# Altium PCB PX4FMUv2.4.6.PcbDoc (part 1 of 3)
Units mil, origin at the board's own origin, x right, y up, seen from the top; angles counter-clockwise.
Board outline 2756 x 1595 mil, 6 copper layers (Top, Ground, Horizontal, Vertical, Power, Bottom), stack 65.355 mil thick; 290 components, 261 nets, 1159 pads, 472 vias.
Unrouted connection lines stored in the file: 14.
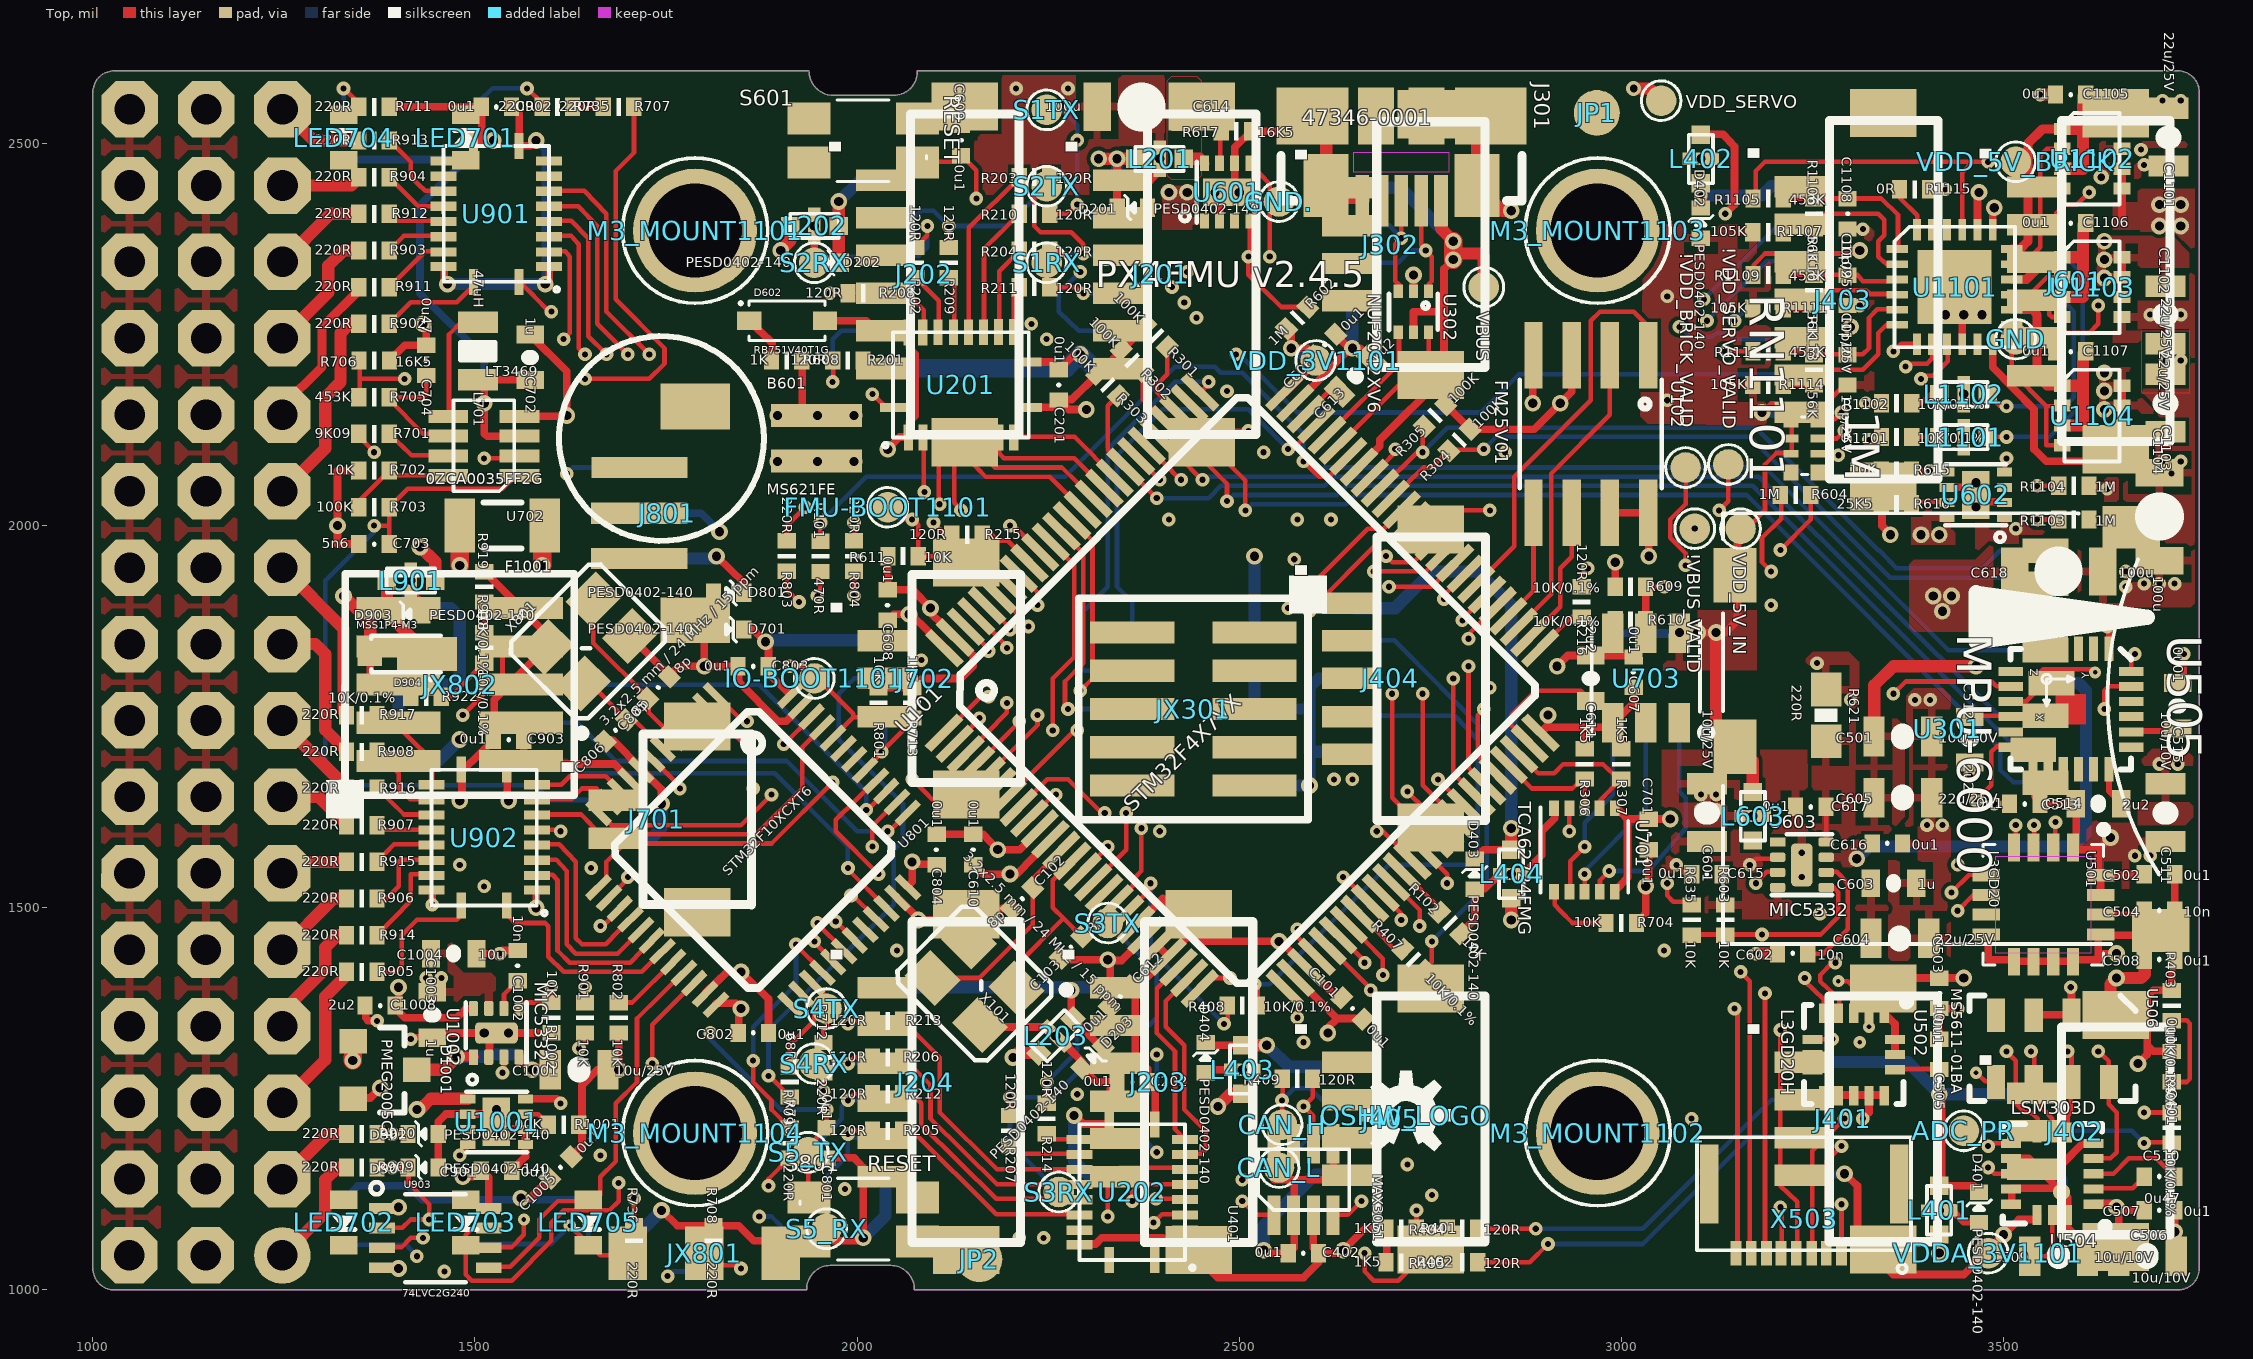
[diagram p0: Top view]
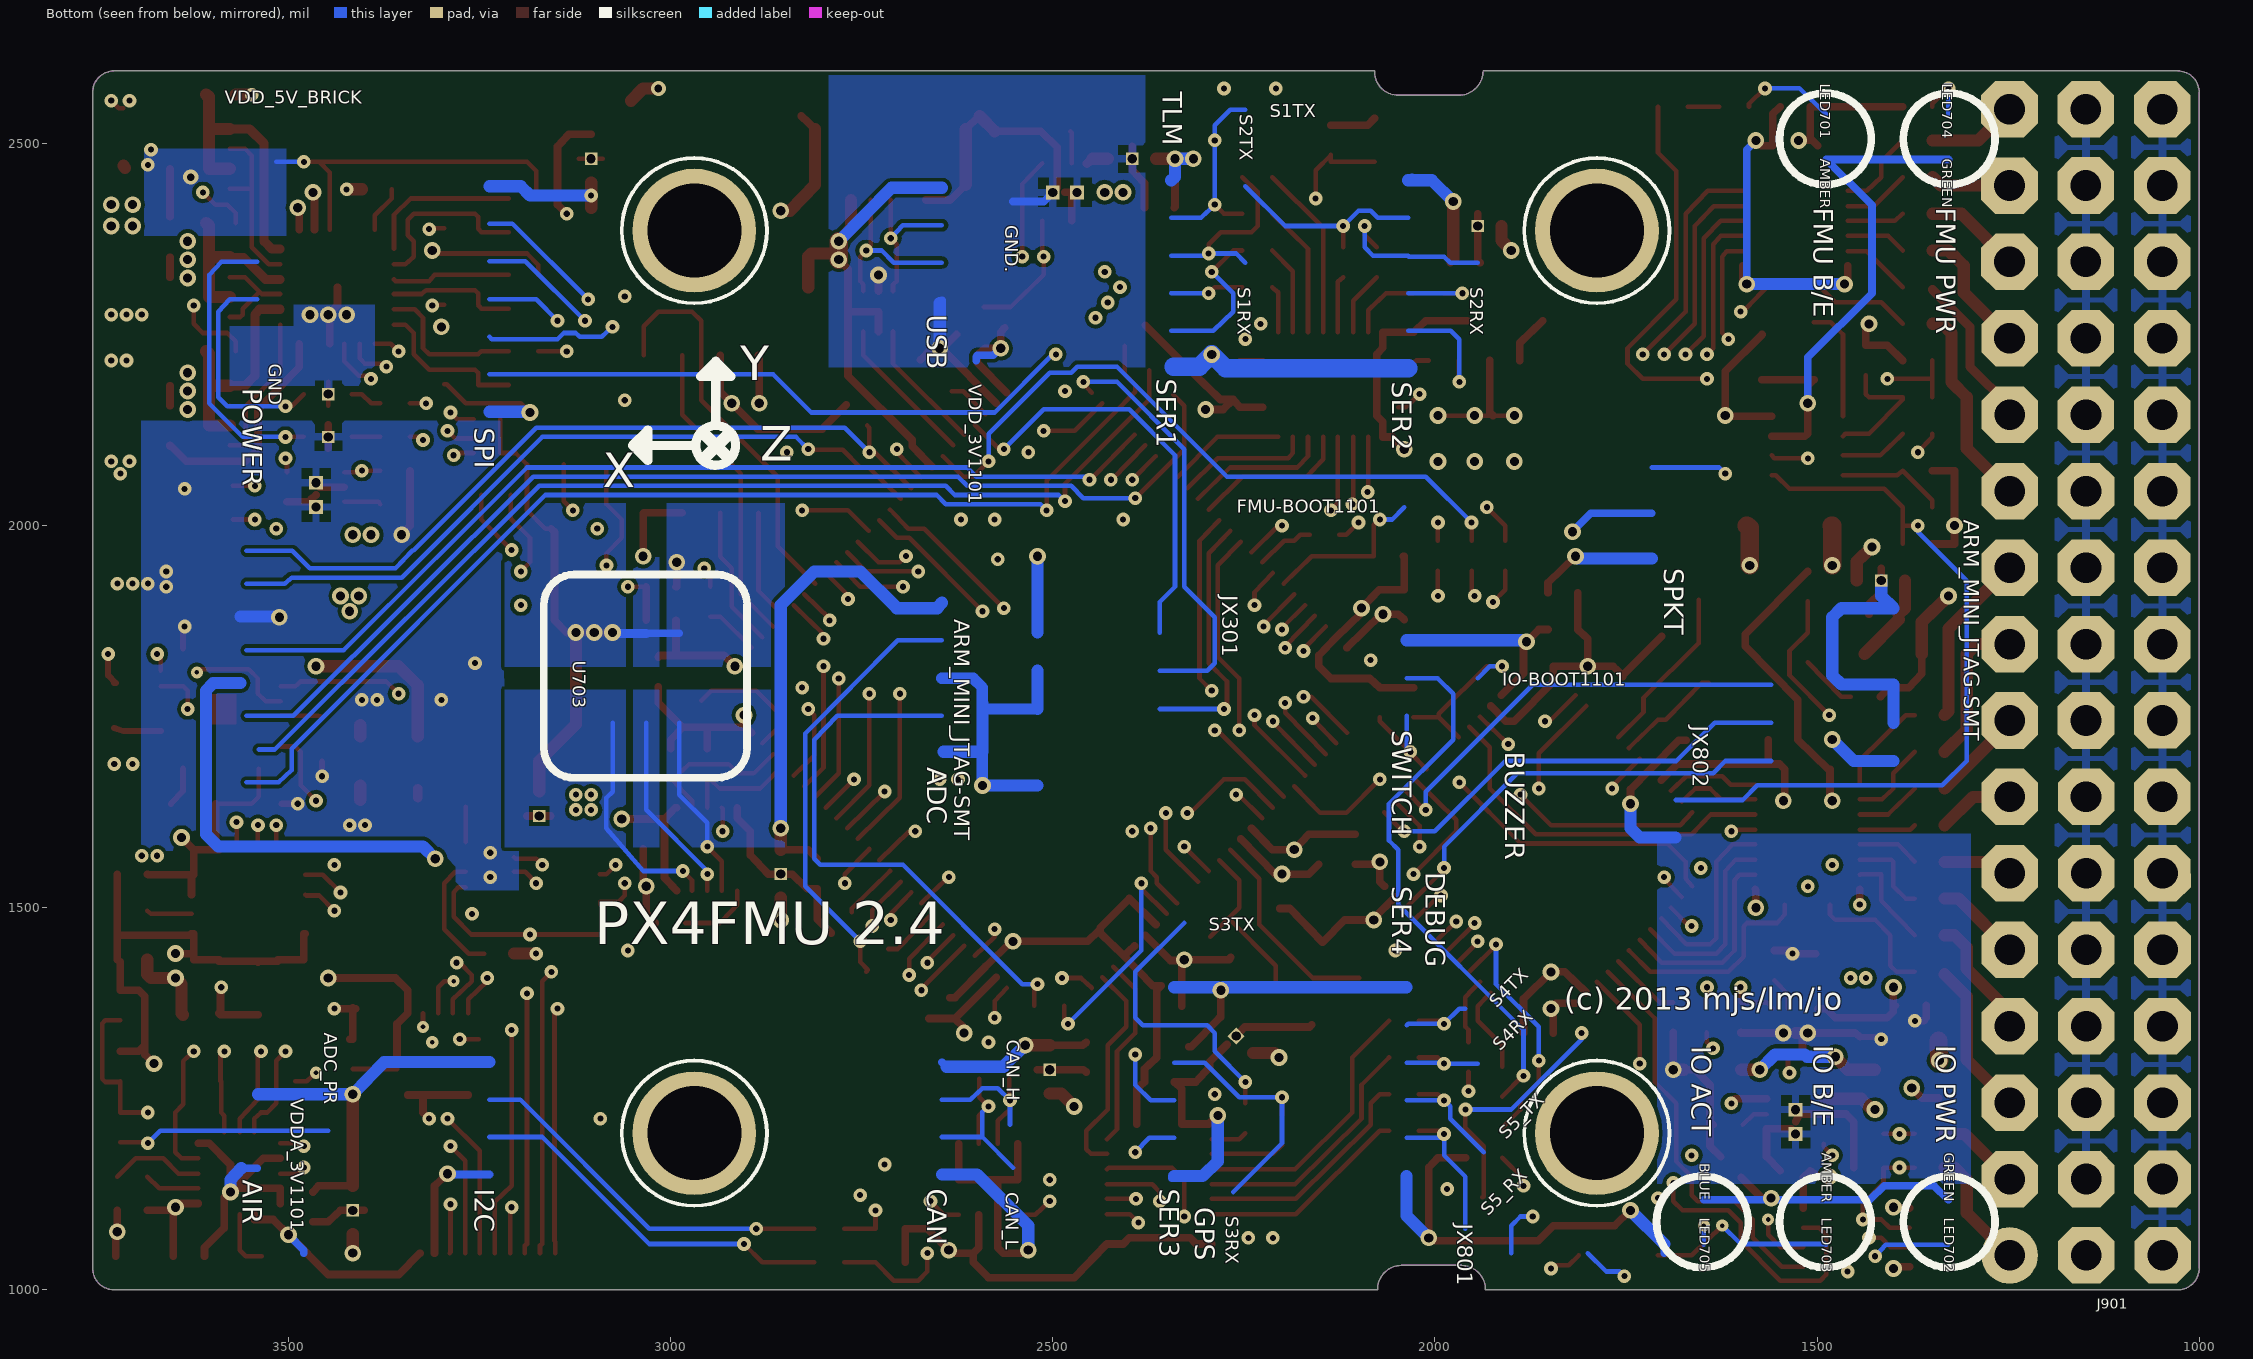
[diagram p1: Bottom view, seen from below]
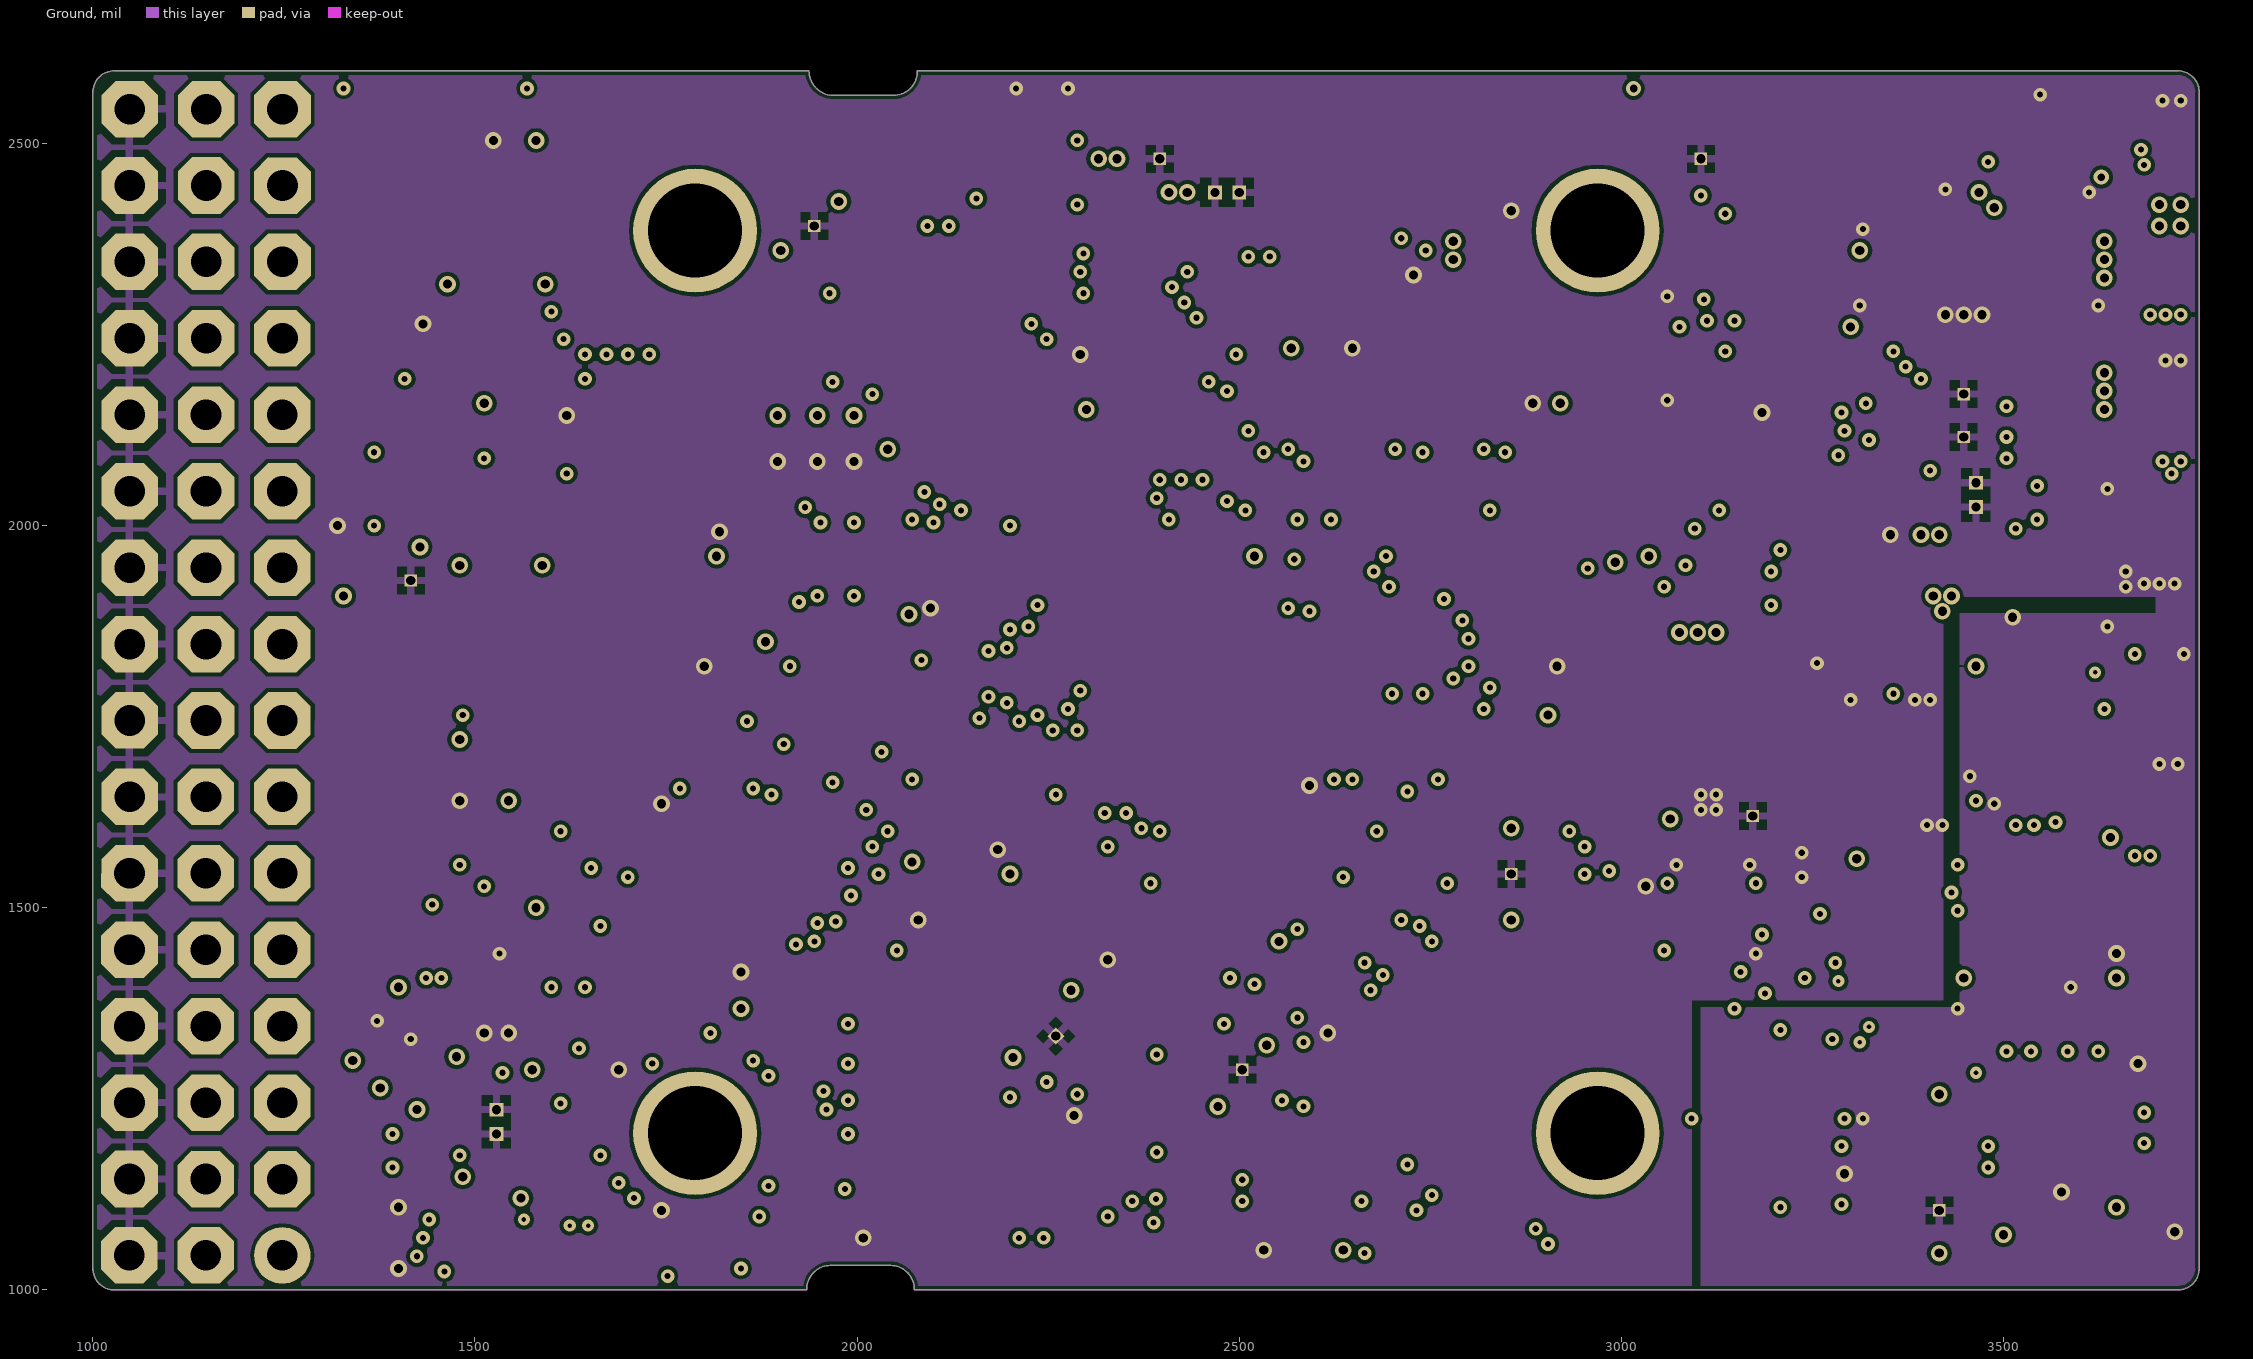
[diagram p2: Ground]
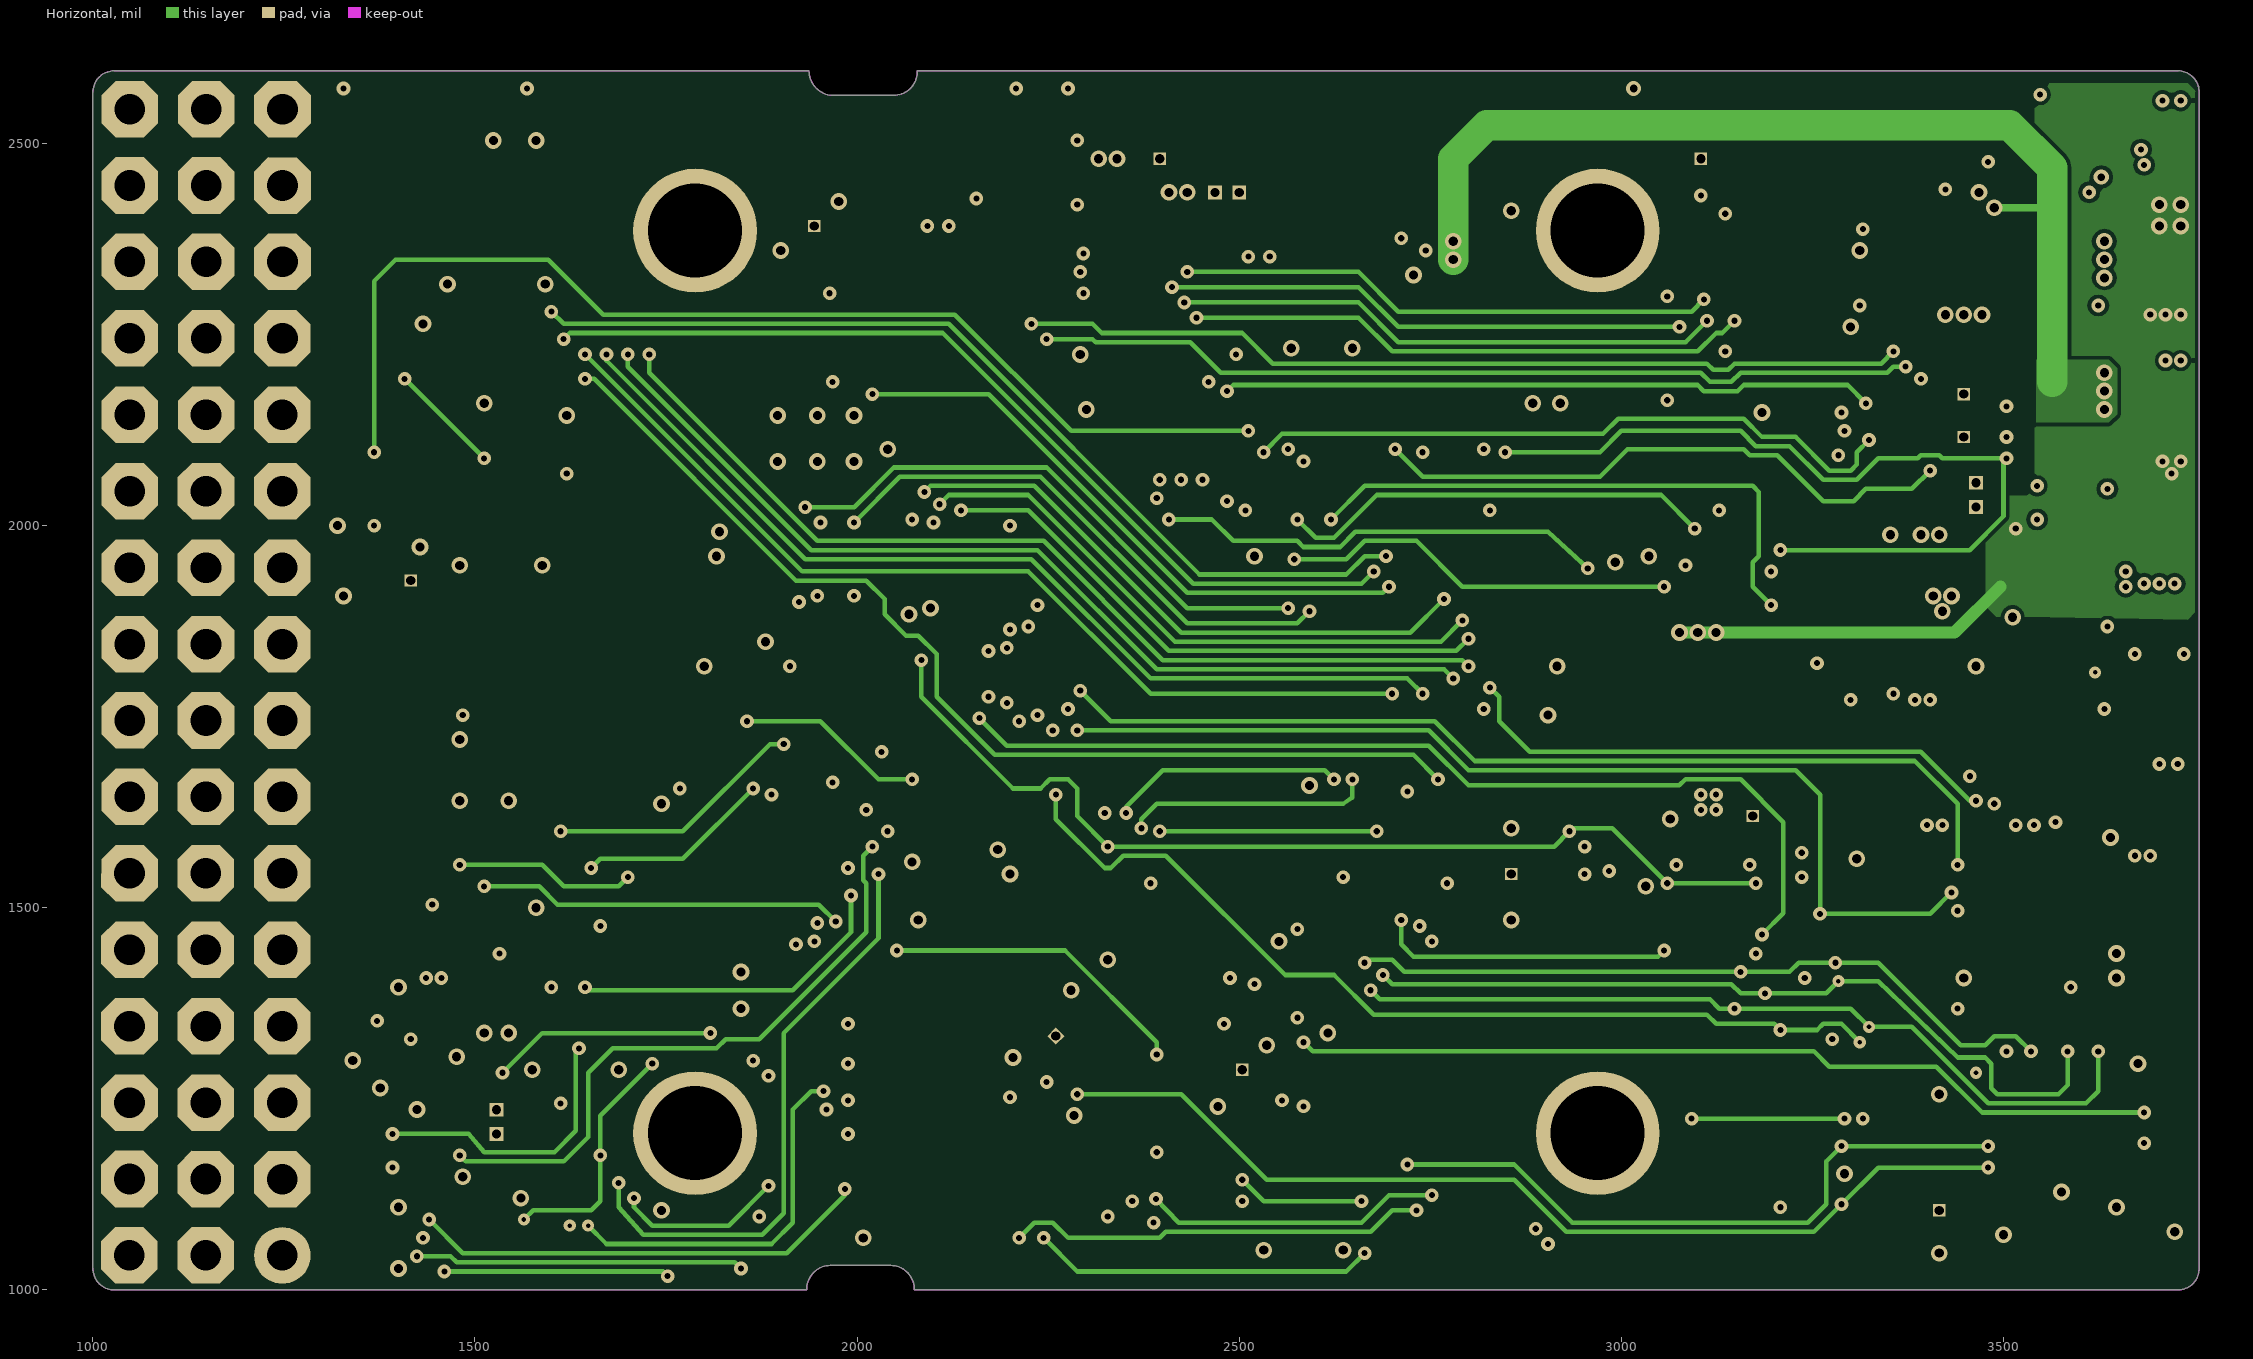
[diagram p3: Horizontal]
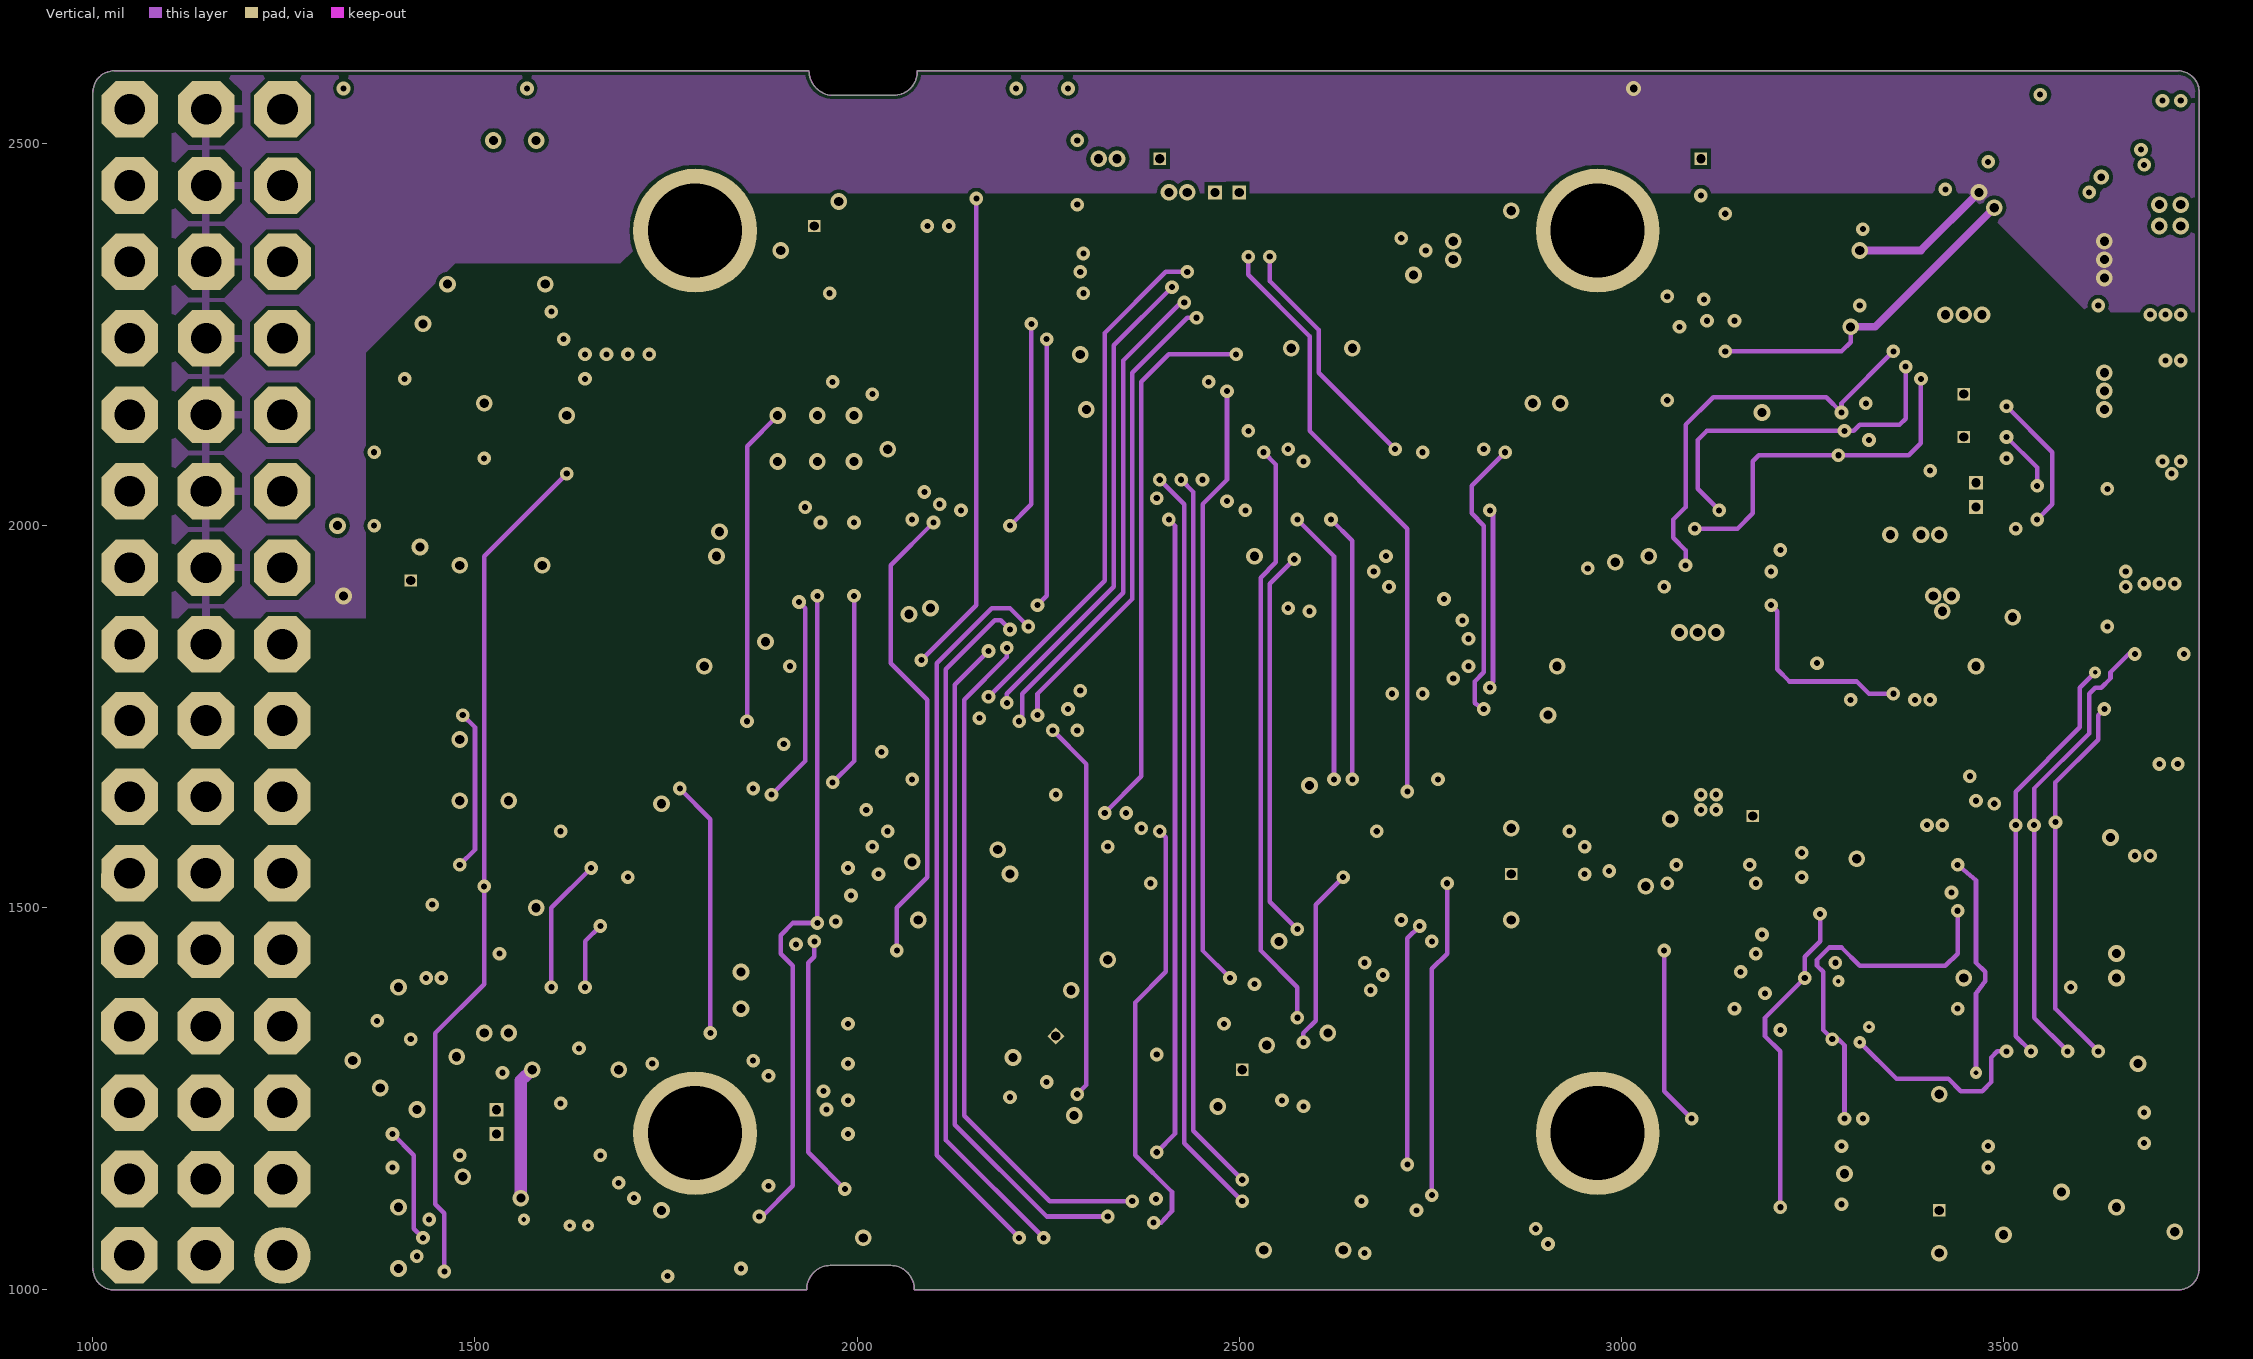
[diagram p4: Vertical]
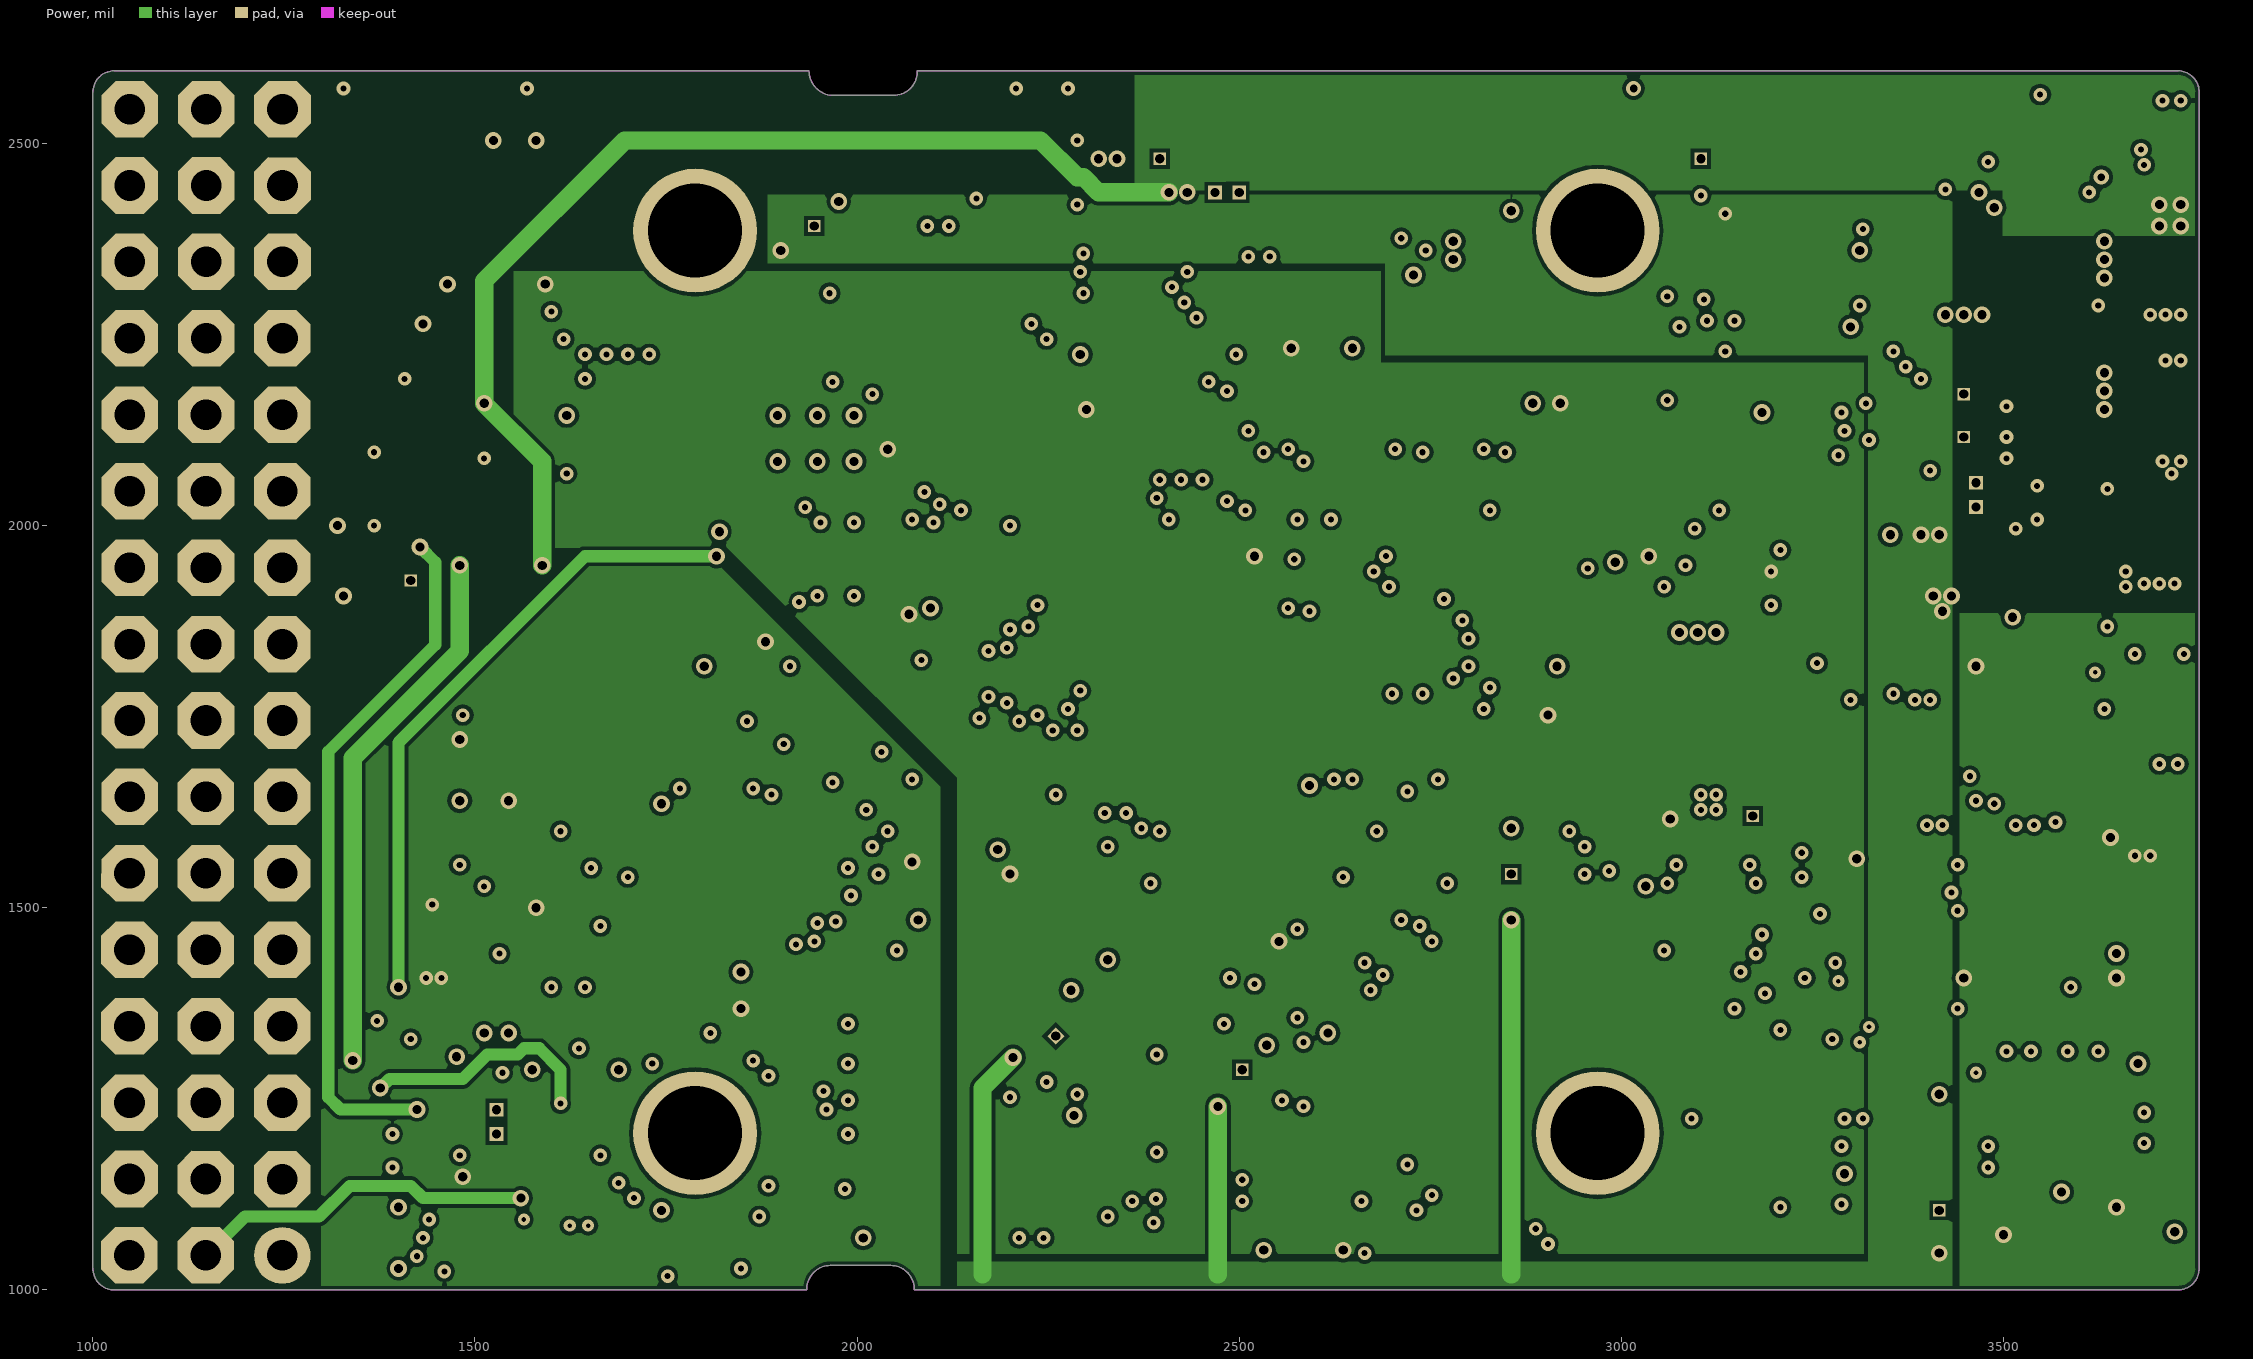
[diagram p5: Power]

## Layer stack, top to bottom
Top Solder: solder mask 0.4, Solder Resist, Dk 3.5
Top: signal copper 1.378
Dielectric 1: core 19.685, FR-4, Dk 4.8
Ground: signal copper 1.378
Dielectric 2: core 19.685, FR-4, Dk 4.8
Horizontal: signal copper 1.378
Dielectric 3: core 5.9055, FR-4, Dk 4.8
Vertical: signal copper 1.378
Dielectric 4: core 5.9055, FR-4, Dk 4.8
Power: signal copper 1.378
Dielectric 5: core 5.9055, FR-4, Dk 4.8
Bottom: signal copper 1.378
Bottom Solder: solder mask 0.4, Solder Resist, Dk 3.5

## Board outline
3729,2595 cw(c3728.5,2567.5) 3756,2567 3756,1028 cw(c3728.5,1027.5) 3729,1000 2075,1000 ccw(c2043.5,1000.5) 2044,1032 1965,1032 ccw(c1965.5,1000.5) 1934,1000 1028,1000 cw(c1028,1028) 1000,1028 1000,2567 cw(c1028,2567) 1028,2595 1937,2595 ccw(c1969,2595) 1969,2563 2048,2563 ccw(c2047.5,2594.5) 2079,2595

## Design rules (kind name [scope] priority, off if disabled: settings)
Clearance [All] p1: gap=5
Clearance "Clearance (Same Net)" [All] p2: gap=0
HoleSize HoleSize_1 [All] p1: absolutevalues=TRUE maxlimit=100000 minlimit=7.87 maxpercent=80.000 minpercent=20.000
HoleSize [All] p2: absolutevalues=TRUE maxlimit=100 minlimit=1 maxpercent=80.000 minpercent=20.000
HoleToHoleClearance mdViaViaSameLayer [All] p1: gap=8 allowstackedmicrovias=TRUE
HoleToHoleClearance [All] p2: gap=10 allowstackedmicrovias=TRUE
PasteMaskExpansion mlMinCreamFrame [All] p1: expansion=-4
PasteMaskExpansion [All] p2: expansion=0
PolygonConnect ThermalVias [IsVia] p1: connectstyle=Direct reliefconductorwidth=10 reliefentries=4 polygonreliefangle="90 Angle" airgapwidth=10
PolygonConnect [All] p2: connectstyle=Relief reliefconductorwidth=10 reliefentries=4 polygonreliefangle="90 Angle" airgapwidth=10
RoutingVias [All] p1: holewidth=28 width=50 viastyle="Through Hole" minholewidth=28 minwidth=50 maxholewidth=28 maxwidth=50
SilkToSilkClearance [All] p1 off: silktosilkclearance=10
SilkToSolderMaskClearance [IsPad] p1 off: minsilkscreentomaskgap=10 clearancetoexposedcopper=TRUE
SolderMaskExpansion mlMinStopFrame [All] p1: expansion=1
SolderMaskExpansion [All] p2: expansion=4
Width Width_1 [All] p1: maxlimit=100000 minlimit=5.91 preferedwidth=10
Width [All] p2: maxlimit=10 minlimit=10 preferedwidth=10
25 further rules are at their usual default settings.

## Components (designator, comment, footprint, x,y, rotation, side; value= is the part's Value field where it differs from the comment)
!VBUS_VALID "" PAD.04X.04#1 3096,1996 r270 top
!VDD_BRICK_VALID "" PAD.04X.04#1 3084,2076 r90.02 top
!VDD_SERVO_VALID "" PAD.04X.04#1 3140,2080 r90.02 top
ADC_PR "" PAD.04X.04#2 3448,1208 r270 bottom
B601 "MS621FE" MS621FE 1744,2114 r0 top
C101 "0u1" 0402-CAP 2648,1368 r315.01 top
C102 "8p" 0402-CAP 2216,1512 r225.02 top
C103 "8p" 0402-CAP 2280,1448 r45.01 top
C201 "0u1" 0402-CAP 2264,2184 r90.02 top
C202 "0u1" 0402-CAP 2360,1272 r180.01 top
C401 "0u1" 0402-CAP 3720,1292 r90.02 top
C402 "0u1" 0402-CAP 2584,1048 r180.01 top
C501 "10u/10V" 0805-CAP 3368,1724 r0 top
C502 "0u1" 0402-CAP 3704,1544 r0 top
C503 "0u1" 0402-CAP 3416,1388 r270 top
C504 "10n" 0402-CAP 3704,1496 r0 top
C505 "10n" 0402-CAP 3416,1308 r90.02 top
C506 "10u/10V" 0805-CAP 3688,1044 r0 top
C507 "0u1" 0402-CAP 3704,1104 r0 top
C508 "0u1" 0402-CAP 3704,1432 r0 top
C509 "10u/10V" 0805-CAP 3572,1044 r0 top
C510 "0u47" 0402-CAP 3704,1148 r0 top
C511 "10u/10V" 0805-CAP 3712,1624 r90.02 top
C512 "2u2" 0603-CAP 3456,1720 r270 top
C513 "2u2" 0603-CAP 3624,1636 r0 top
C514 "0u1" 0402-CAP 3528,1636 r180.01 top
C515 "0u01" 0603-CAP 3728,1764 r90.02 top
C601 "10u/25V" 0805-CAP 3112,1624 r90.02 top
C602 "10n" 0402-CAP 3224,1440 r0 top
C603 "1u" 0603-CAP 3356,1532 r0 top
C604 "22u/25V" 0805-CAP 3364,1460 r0 top
C605 "22u/25V" 0805-CAP 3368,1644 r0 top
C606 "0u1" 0402-CAP 2612,2236 r45.01 top
C607 "0u1" 0402-CAP 3016,1808 r90.02 top
C608 "0u1" 0402-CAP 2040,1896 r90.02 top
C609 "0u1" 0402-CAP 2136,2504 r270 top
C610 "0u1" 0402-CAP 2152,1576 r90.02 top
C611 "2u2" 0603-CAP 2960,1800 r90.02 top
C612 "0u1" 0402-CAP 2344,1384 r225.02 top
C613 "2u2" 0603-CAP 2652,2196 r45.01 top
C614 "100u" 1206-CAP 2372,2548 r180.01 top
C615 "0u1" 0402-CAP 3112,1544 r180.01 top
C616 "0u1" 0402-CAP 3348,1584 r0 top
C617 "0u1" 0402-CAP 3248,1632 r180.01 top
C618 "100u" 1206-CAP 3572,1940 r0 top
C701 "0u1" 0402-CAP 3036,1596 r270 top
C702 "1u" 0603-CAP 1572,2220 r90.02 top
C703 "5n6" 0402-CAP 1368,1976 r180.01 top
C704 "0u47" 0402-CAP 1436,2216 r90.02 top
C801 "0u1" 0402-CAP 1960,1192 r90.02 top
C802 "0u1" 0402-CAP 1864,1336 r0 top
C803 "0u1" 0402-CAP 1864,1816 r180.01 top
C804 "0u1" 0402-CAP 2104,1576 r90.02 top
C805 "8p" 0402-CAP 1740,1788 r45.01 top
C806 "8p" 0402-CAP 1684,1732 r45.01 top
C901 "0u1" 0402-CAP 1528,1156 r0 top
C902 "0u1" 0402-CAP 1528,2548 r180.01 top
C903 "0u1" 0402-CAP 1544,1720 r180.01 top
C1001 "10u/25V" 0805-CAP 1636,1288 r0 top
C1002 "10n" 0402-CAP 1556,1424 r90.02 top
C1003 "1u" 0603-CAP 1444,1360 r270 top
C1004 "10u" 0603-CAP 1472,1440 r0 top
C1005 "0u1" 0402-CAP 1612,1160 r45.01 top
C1008 "2u2" 0402-CAP 1376,1372 r180.01 top
C1101 "22u/25V" 0805-CAP 3716,2508 r90.02 top
C1102 "22u/25V" 0805-CAP 3712,2276 r270 top
C1103 "22u/25V" 0805-CAP 3712,2160 r90.02 top
C1104 "100u" 1206-CAP 3704,2012 r270 top
C1105 "0u1" 0402-CAP 3588,2564 r180.01 top
C1106 "0u1" 0402-CAP 3588,2396 r180.01 top
C1107 "0u1" 0402-CAP 3588,2228 r180.01 top
C1108 "10p/25V" 0402-CAP 3296,2408 r270 top
C1109 "10p/25V" 0402-CAP 3296,2308 r270 top
C1110 "10p/25V" 0402-CAP 3296,2204 r270 top
CAN_H "" PAD.04X.04#2 2556,1216 r89.98 bottom
CAN_L "" PAD.04X.04#2 2552,1160 r270 bottom
D201 "PESD0402-140" 0402-TVS 2360,2416 r0 top
D202 "PESD0402-140" 0402-TVS 1960,2344 r180.01 top
D203 "PESD0402-140" 0402-TVS 2308,1304 r225.02 top
D401 "PESD0402-140" 0402-TVS 3468,1108 r270 top
D402 "PESD0402-140" 0402-TVS 3104,2396 r270 top
D403 "PESD0402-140" 0402-TVS 2808,1544 r270 top
D404 "PESD0402-140" 0402-TVS 2456,1304 r270 top
D602 "RB751V40T1G" SOD323 1908,2268 r0 top
D701 "PESD0402-140" 0402-TVS 1832,1864 r180.01 top
D801 "PESD0402-140" 0402-TVS 1832,1912 r180.01 top
D901 "PESD0402-140" 0402-TVS 1432,1160 r0 top
D902 "PESD0402-140" 0402-TVS 1432,1204 r0 top
D903 "PESD0402-140" 0402-TVS 1412,1884 r0 top
D904 "MSS1P4-M3" MICROSMP 1388,1832 r180.01 top
D1001 "PMEG2005CT" SOT23-3 1380,1288 r270 top
F1001 "0ZCA0035FF2G" PTC-1206 1536,2000 r180.01 top
FMU-BOOT1101 "" PAD.04X.04#2 2040,2024 r180 bottom
GND "" PAD.04X.04#2 3516,2244 r270 bottom
GND. "" PAD.04X.04#2 2552,2424 r180 bottom
IO-BOOT1101 "" PAD.04X.04#2 1944,1800 r180 bottom
J201 "" DF13C-6P-1.25V 2380,2329 r270 bottom
J202 "" DF13C-6P-1.25V 2070,2329 r270 bottom
J203 "" DF13C-6P-1.25V 2376,1272 r270 bottom
J204 "" DF13C-6P-1.25V 2072,1272 r270 bottom
J301 "47346-0001" MOLEX-47346-0001 2712,2536 r270 top
J302 "" DF13C-4P-1.25V 2680,2368 r270 bottom
J401 "" DF13C-4P-1.25V 3272,1224 r270 bottom
J402 "" DF13C-3P-1.25V 3576,1208 r270 bottom
J403 "" DF13C-7P-1.25V 3272,2296 r270 bottom
J404 "" DF13C-5P-1.25V 2680,1800 r270 bottom
J405 "" DF13C-4P-1.25V 2680,1224 r270 bottom
J601 "" DF13C-6P-1.25V 3576,2320 r270 bottom
J701 "" DF13C-2P-1.25V 1720,1616 r270 bottom
J702 "" DF13C-3P-1.25V 2072,1800 r270 bottom
J801 "" JST-ZH-SMT-VERTICAL 1784,2016 r89.98 bottom
J901 "" 3X16RA 1148,1795 r359.99 bottom
JP1 "" FIDUCIAL-1.5X3 2968,2540 r0 top
JP2 "" FIDUCIAL-1.5X3 2160,1040 r0 top
JX301 "ARM_MINI_JTAG-SMT" FTSH-105-01-XXX-DV-K 2440,1760 r270 bottom
JX801 "" HEADER_3X01_SMD_H_BOARD_EDGE_SHORT 1800,1048 r180 bottom
JX802 "ARM_MINI_JTAG-SMT" FTSH-105-01-XXX-DV-K 1480,1792 r89.98 bottom
L201 "" KYOCERA-KNH16-DA 2396,2480 r180.01 top
L202 "" KYOCERA-KNH16-DA 1944,2392 r0 top
L203 "" KYOCERA-KNH16-DA 2260,1332 r45.01 top
L401 "" KYOCERA-KNH16-DA 3416,1104 r90.02 top
L402 "" KYOCERA-KNH16-DA 3104,2480 r270 top
L403 "" KYOCERA-KNH16-DA 2504,1288 r90.02 top
L404 "" KYOCERA-KNH16-DA 2856,1544 r90.02 top
L603 "" KYOCERA-KNH16-DA 3172,1620 r270 top
L701 "47uH" 0805-IND 1504,2228 r90.02 top
L901 "" KYOCERA-KNH16-DA 1416,1928 r0 top
L1101 "" KYOCERA-KNH16-DA 3448,2116 r180.01 top
L1102 "" KYOCERA-KNH16-DA 3448,2172 r180.01 top
LED701 "AMBER" 0603-LED 1488,2508 r270 bottom
LED702 "GREEN" 0603-LED 1328,1088 r89.98 bottom
LED703 "AMBER" 0603-LED 1488,1088 r89.98 bottom
LED704 "GREEN" 0603-LED 1328,2508 r270 bottom
LED705 "BLUE" 0603-LED 1648,1088 r89.98 bottom
M3_MOUNT1101 "" MOUNT-HOLE3.1 1788,2386 r0 top
M3_MOUNT1102 "" MOUNT-HOLE3.1 2969,1205 r0 top
M3_MOUNT1103 "" MOUNT-HOLE3.1 2969,2386 r0 top
M3_MOUNT1104 "" MOUNT-HOLE3.1 1788,1205 r0 top
OSHW_LOGO "" OSHW-LOGO-S 2718,1228 r0 top
R101 "470R" 0402-RES 1952,1960 r270 top
R102 "10K" 0402-RES 2776,1480 r315.01 top
R201 "120R" 0402-RES 1988,2216 r180.01 top
R202 "120R" 0402-RES 2076,2344 r90.02 top
R203 "120R" 0402-RES 2232,2456 r0 top
R204 "120R" 0402-RES 2232,2360 r0 top
R205 "120R" 0402-RES 2040,1208 r180.01 top
R206 "120R" 0402-RES 2040,1304 r180.01 top
R207 "120R" 0402-RES 2200,1208 r90.02 top
R208 "120R" 0402-RES 2008,2304 r180.01 top
R209 "120R" 0402-RES 2120,2344 r90.02 top
R210 "120R" 0402-RES 2232,2408 r0 top
R211 "120R" 0402-RES 2232,2312 r0 top
R212 "120R" 0402-RES 2040,1256 r180.01 top
R213 "120R" 0402-RES 2040,1352 r180.01 top
R214 "120R" 0402-RES 2248,1224 r90.02 top
R215 "120R" 0402-RES 2144,1988 r180.01 top
R216 "120R" 0402-RES 2948,1900 r90.02 top
R301 "100K" 0402-RES 2392,2248 r135 top
R302 "100K" 0402-RES 2360,2216 r135 top
R303 "100K" 0402-RES 2328,2184 r135 top
R304 "100K" 0402-RES 2788,2112 r45.01 top
R305 "100K" 0402-RES 2756,2144 r45.01 top
R306 "1K5" 0402-RES 2952,1688 r90.02 top
R307 "1K5" 0402-RES 3000,1688 r90.02 top
R401 "1K5" 0402-RES 2712,1080 r180.01 top
R402 "1K5" 0402-RES 2712,1036 r180.01 top
R403 "10K/0.1%" 0402-RES 3720,1372 r270 top
R404 "120R" 0402-RES 2792,1080 r0 top
R405 "120R" 0402-RES 2792,1036 r0 top
R406 "10K/0.1%" 0402-RES 3720,1212 r270 top
R407 "10K/0.1%" 0402-RES 2728,1432 r315.01 top
R408 "10K/0.1%" 0402-RES 2504,1372 r0 top
R409 "120R" 0402-RES 2576,1276 r0 top
R602 "1M" 0402-RES 2576,2272 r225.02 top
R603 "10K" 0402-RES 3136,1484 r270 top
R604 "1M" 0402-RES 3228,2040 r180.01 top
R608 "1K" 0402-RES 1908,2216 r180.01 top
R609 "10K/0.1%" 0402-RES 3012,1920 r180.01 top
R610 "10K/0.1%" 0402-RES 3012,1876 r180.01 top
R611 "10K" 0402-RES 2060,1960 r0 top
R615 "10K" 0402-RES 3360,2072 r180.01 top
R616 "25K5" 0402-RES 3360,2028 r180.01 top
R617 "16K5" 0402-RES 2496,2516 r0 top
R621 "220R" 0603-RES 3268,1752 r270 top
R635 "10K" 0402-RES 3092,1484 r270 top
R701 "9K09" 0402-RES 1368,2120 r180.01 top
R702 "10K" 0402-RES 1368,2072 r180.01 top
R703 "100K" 0402-RES 1368,2024 r180.01 top
R704 "10K" 0402-RES 3000,1480 r180.01 top
R705 "453K" 0402-RES 1368,2168 r180.01 top
R706 "16K5" 0402-RES 1368,2216 r0 top
R707 "220R" 0402-RES 1688,2548 r180.01 top
R708 "220R" 0402-RES 1812,1064 r270 top
R709 "220R" 0402-RES 1912,1192 r270 top
R710 "68R" 0402-RES 1912,1272 r90.02 top
R711 "220R" 0402-RES 1368,2548 r180.01 top
R712 "220R" 0402-RES 1956,1304 r270 top
R713 "1K5" 0402-RES 2072,1768 r90.02 top
R735 "220R" 0402-RES 1608,2548 r180.01 top
R736 "220R" 0402-RES 1708,1064 r270 top
R801 "10K" 0402-RES 2028,1768 r90.02 top
R802 "10K" 0402-RES 1688,1356 r270 top
R803 "220R" 0402-RES 1908,1960 r90.02 top
R804 "220R" 0402-RES 1996,1960 r90.02 top
R901 "10K" 0402-RES 1644,1356 r270 top
R902 "220R" 0402-RES 1368,2264 r180.01 top
R903 "220R" 0402-RES 1368,2360 r180.01 top
R904 "220R" 0402-RES 1368,2456 r180.01 top
R905 "220R" 0402-RES 1352,1416 r180.01 top
R906 "220R" 0402-RES 1352,1512 r180.01 top
R907 "220R" 0402-RES 1352,1608 r180.01 top
R908 "220R" 0402-RES 1352,1704 r180.01 top
R909 "220R" 0402-RES 1352,1160 r180.01 top
R910 "220R" 0402-RES 1352,1204 r180.01 top
R911 "220R" 0402-RES 1368,2312 r180.01 top
R912 "220R" 0402-RES 1368,2408 r180.01 top
R913 "220R" 0402-RES 1368,2504 r180.01 top
R914 "220R" 0402-RES 1352,1464 r180.01 top
R915 "220R" 0402-RES 1352,1560 r180.01 top
R916 "220R" 0402-RES 1352,1656 r180.01 top
R917 "220R" 0402-RES 1352,1752 r180.01 top
R918 "10K/0.1%" 0402-RES 1512,1840 r270 top
R919 "10K/0.1%" 0402-RES 1512,1920 r270 top
R922 "10K/0.1%" 0402-RES 1436,1776 r180.01 top
R1001 "100K" 0402-RES 1616,1216 r180.01 top
R1002 "10K" 0402-RES 1600,1356 r90.02 top
R1101 "10K/0.1%" 0402-RES 3360,2116 r0 top
R1102 "10K/0.1%" 0402-RES 3360,2160 r0 top
R1103 "1M" 0402-RES 3592,2008 r0 top
R1104 "1M" 0402-RES 3592,2052 r0 top
R1105 "453K" 0402-RES 3192,2428 r0 top
R1106 "56K" 0402-RES 3252,2408 r270 top
R1107 "105K" 0402-RES 3192,2384 r180.01 top
R1109 "453K" 0402-RES 3192,2328 r0 top
R1110 "56K" 0402-RES 3252,2308 r270 top
R1111 "105K" 0402-RES 3192,2284 r180.01 top
R1112 "453K" 0402-RES 3192,2228 r0 top
R1113 "56K" 0402-RES 3252,2204 r270 top
R1114 "105K" 0402-RES 3192,2184 r180.01 top
R1115 "0R" 0402-RES 3384,2440 r180.01 top
RN1101 "1M" EXB28V 3240,2104 r90.02 top
S1RX "" PAD.04X.04#2 2248,2344 r270 bottom
S1TX "" PAD.04X.04#2 2248,2544 r180 bottom
S2RX "" PAD.04X.04#2 1944,2344 r270 bottom
S2TX "" PAD.04X.04#2 2248,2444 r89.98 bottom
S3RX "" PAD.04X.04#2 2264,1128 r270 bottom
S3TX "" PAD.04X.04#2 2328,1480 r180 bottom
S4RX "" PAD.04X.04#2 1944,1296 r134.99 bottom
S4TX "" PAD.04X.04#2 1960,1368 r134.99 bottom
S5_RX "" PAD.04X.04#2 1960,1080 r134.99 bottom
S5_TX "" PAD.04X.04#2 1936,1180 r134.99 bottom
S601 "RESET" EVQP7J01K 2008,2504 r180.01 top
S801 "RESET" EVQP7J01K 2008,1092 r0 top
U101 "STM32F4X7VX" TQFP100 2504,1784 r45.01 top
U102 "FM25V01" SO08 2960,2120 r180.01 top
U201 "" QFN20-RGY 2136,2184 r90.02 top
U202 "" QFN20-RGY 2360,1128 r180.01 top
U301 "" MICROSD 3448,1740 r89.98 bottom
U302 "NUF2042XV6" SOT563-6 2728,2280 r180.01 top
U401 "MAX3051" SOT23-8 2584,1144 r0 top
U501 "L3GD20" L3G4200DH-MAN 3552,1504 r270 top
U502 "L3GD20H" LGA-16L 3304,1308 r270 top
U504 "LSM303D" LGA-16L 3564,1152 r180.01 top
U505 "MPU-6000" QFN-24 3588,1760 r270 top
U506 "MS5611-01BA" MS5611-01BA 3564,1316 r270 top
U601 "" QFN8-DSG 2484,2436 r0 top
U602 "" QFN8-DSG 3464,2040 r90.02 top
U603 "MIC5332" MLF-8-EPAD 3236,1556 r0 top
U701 "TCA62724FMG" SON10 2952,1576 r180.01 top
U702 "LT3469" SOT23-8 1512,2104 r90.02 top
U703 "" 6-PLCC 3032,1800 r89.98 bottom
U801 "STM32F10XCXT6" TQFP48 1864,1576 r225.02 top
U901 "" QFN20-RGY 1528,2408 r180.01 top
U902 "" QFN20-RGY 1512,1592 r180.01 top
U903 "74LVC2G240" TSSOP8_SOT505-2 1448,1068 r270 top
U1001 "" QFN8-DSG 1528,1220 r270 top
U1002 "MIC5332" MLF-8-EPAD 1528,1336 r90.02 top
U1101 "" MO-220 3436,2312 r0 top
U1102 "" 1206-8 3616,2480 r270 top
U1103 "" 1206-8 3616,2312 r270 top
U1104 "" 1206-8 3616,2144 r270 top
VBUS "" PAD.04X.04#1 2820,2312 r270 top
VDD_3V1101 "" PAD.04X.04#2 2600,2216 r180 bottom
VDD_5V_BRICK "" PAD.04X.04#2 3516,2476 r270 bottom
VDD_5V_IN "" PAD.04X.04#1 3156,1996 r270 top
VDD_SERVO "" PAD.04X.04#1 3052,2556 r0 top
VDDA_3V1101 "" PAD.04X.04#2 3480,1048 r180 bottom
X101 "3.2x2.5 mm / 24 MHz / 15 ppm" OSCILLATOR-3.2X2.5 2154,1401 r135 top
X503 "" 51281-1094 3328,1048 r180.01 top
X801 "3.2x2.5 mm / 24 MHz / 15 ppm" OSCILLATOR-3.2X2.5 1648,1848 r45.01 top

## Footprints (in the part's own frame and the unit in brackets; to place one, negate y for a bottom-side part, rotate by r counter-clockwise, add the part's x,y. Pads: shape width x height; smd on the part's side, far side on the other; paste and mask are expansions set on the pad)
3X16RA [mil] "3X16RA"
  round 74 hole 40: 1(100,750)
  oct 74x74 hole 40: 2(0,750) 3(-100,750) 4(100,650) 5(0,650) 6(-100,650) 7(100,550) 8(0,550) 9(-100,550) 10(100,450) 11(0,450) 12(-100,450) 13(100,350) 14(0,350) 15(-100,350) 16(100,250) 17(0,250) 18(-100,250) 19(100,150) 20(0,150) 21(-100,150) 22(100,50) 23(0,50) 24(-100,50) 25(100,-50) 26(0,-50) 27(-100,-50) 28(100,-150) 29(0,-150) 30(-100,-150) 31(100,-250) 32(0,-250) 33(-100,-250) 34(100,-350) 35(0,-350) 36(-100,-350) 37(100,-450) 38(0,-450) 39(-100,-450) 40(100,-550) 41(0,-550) 42(-100,-550) 43(100,-650) 44(0,-650) 45(-100,-650) 46(100,-750) 47(0,-750) 48(-100,-750)
6-PLCC [mil] "6-PLCC"
  rect 52x28 smd far side: A1(59,44) A2(59,0) A3(59,-43.31) C1(-58.07,44) C2(-58.07,0) C3(-58.07,-43.31)
0402-CAP [mil] "0402-CAP"
  rect 20x24 smd: P$1(-19.69,0) P$2(20,0)
  silkscreen extent 0,0 0,1
0402-RES [mil] "0402-RES"
  rect 20x24 smd: P$1(-19.69,0) P$2(20,0)
  silkscreen extent -3,-12 3,12
0402-TVS [mil] "0402-TVS"
  rect 20x24 smd: A(20,0) C(-19.68,0)
  silkscreen extent -10,-16 3,16
0603-CAP [mil] "0603-CAP"
  rect 24x36 smd: P$1(-29.53,0) P$2(30,0)
  silkscreen extent 0,-2 0,2
0603-LED [mil] "0603-LED"
  rect 24x36 smd far side: A(30,0) C(-29.53,0)
0603-RES [mil] "0603-RES"
  rect 44x40 smd: 1(-33.46,0) 2(34,0)
  silkscreen extent -9,-15 9,15
0805-CAP [mil] "0805-CAP"
  rect 28x52 smd: P$1(-37.4,0) P$2(38,0)
  silkscreen extent 0,-2 0,2
0805-IND [mil] "0805-IND"
  rect 28x52 smd: P$1(-37.4,0) P$2(38,0)
  silkscreen extent -12,-23 12,23
1206-8 [mil] "1206-8"
  rect 16x22 smd: P$1(-39,-39) P$2(-13,-39) P$3(13,-39) P$4(39,-39) P$5(39,39) P$6(13,39) P$7(-13,39) P$8(-39,39)
  silkscreen extent -60,-36 60,36
1206-CAP [mil] "1206-CAP"
  rect 36x63 smd: P$1(-57.09,0) P$2(58,0)
  silkscreen extent 0,0 0,1
51281-1094 [mil] "51281-1094"
  rect 14x32 smd: 1(0,0) 2(20,0) 3(40,0) 4(60,0) 5(79,0) 6(99,0) 7(119,0) 8(138,0) 9(158,0) 10(178,0)
  rect 24x103 smd: P$11(-35.43,-90.55) P$12(213,-90.55)
  silkscreen extent -51,-152 229,26
DF13C-2P-1.25V [mil] "DF13C-2P-1.25V"
  rect 28x71 smd far side: 1(-24.61,36) 2(25,36)
  rect 63x87 smd far side: M$0(122,-70.87) M$1(-121.06,-70.87)
DF13C-3P-1.25V [mil] "DF13C-3P-1.25V"
  rect 28x71 smd far side: 1(-49.21,36) 2(0,36) 3(50,36)
  rect 63x87 smd far side: M$0(152,-70.87) M$1(-151.57,-70.87)
DF13C-4P-1.25V [mil] "DF13C-4P-1.25V"
  rect 28x71 smd far side: 1(-73.82,36) 2(-24.61,36) 3(25,36) 4(74,36)
  rect 63x87 smd far side: M$0(171,-70.87) M$1(-170.28,-70.87)
DF13C-5P-1.25V [mil] "DF13C-5P-1.25V"
  rect 28x71 smd far side: 1(-98.43,36) 2(-49.21,36) 3(0,36) 4(50,36) 5(99,36)
  rect 63x87 smd far side: M$0(195,-70.87) M$1(-194.88,-70.87)
DF13C-6P-1.25V [mil] "DF13C-6P-1.25V"
  rect 28x71 smd far side: 1(-123.03,36) 2(-73.82,36) 3(-24.61,36) 4(25,36) 5(74,36) 6(124,36)
  rect 63x87 smd far side: M$0(220,-70.87) M$1(-219.49,-70.87)
DF13C-7P-1.25V [mil] "DF13C-7P-1.25V"
  rect 28x71 smd far side: 1(-147.64,36) 2(-98.43,36) 3(-49.21,36) 4(0,36) 5(50,36) 6(99,36) 7(148,36)
  rect 63x87 smd far side: M$0(245,-70.87) M$1(-244.09,-70.87)
EVQP7J01K [mil] "EVQP7J01K"
  rect 56x42 smd: A1(-70.87,29) A2(71,29) B3(-70.87,-28.54) B4(71,-28.54)
  silkscreen extent -83,-53 34,54
EXB28V [mil] "EXB28V"
  rect 21x20 smd: 1(-34.45,-17.72) 4(35,-17.72) 5(35,18) 8(-34.45,18)
  rect 10x20 smd: 2(-9.84,-17.72) 3(10,-17.72) 6(10,18) 7(-9.84,18)
  silkscreen extent -37,-4 38,4
FIDUCIAL-1.5X3 [mil] "FIDUCIAL-1.5X3"
  rrect100% 60x60 smd: 1(0,0)
FTSH-105-01-XXX-DV-K [mil] "FTSH-105-01-XXX-DV-K"
  rect 29x110 smd far side: 1(-100,-80) 2(-100,80) 3(-50,-80) 4(-50,80) 5(0,-80) 6(0,80) 7(50,-80) 8(50,80) 9(100,-80) 10(100,80)
HEADER_3X01_SMD_H_BOARD_EDGE_SHORT [mil] "HEADER_3X01_SMD_H_BOARD_EDGE_SHORT"
  rect 50x70 smd far side: 1(-100,0) 2(0,0) 3(100,0)
JST-ZH-SMT-VERTICAL [mil] "JST-ZH-SMT-VERTICAL"
  rect 28x126 smd far side: P$1(-59.06,-68.9) P$2(0,-68.9) P$3(60,-68.9)
  rect 60x91 smd far side: P$4(140,4) P$5(-139.76,4)
KYOCERA-KNH16-DA [mil] "KYOCERA-KNH16-DA"
  rect 24x24 smd: P$1(-31.5,0) P$2(32,0)
  rect 16x16 smd: P$3(0,-15.75) P$4(0,16)
  rect 16x16 hole 12: P$5(0,0)
  silkscreen extent -31,-16 32,16
L3G4200DH-MAN [mil] "L3G4200DH-MAN"
  rect 36x16 smd: 1(-74.8,39) 2(-74.8,13) 3(-74.8,-12.8) 4(-74.8,-38.39) 9(75,-38.39) 10(75,-12.8) 11(75,13) 12(75,39)
  rect 16x36 smd: 5(-38.39,-74.8) 6(-12.8,-74.8) 7(13,-74.8) 8(39,-74.8) 13(39,75) 14(13,75) 15(-12.8,75) 16(-38.39,75)
  Top keep-out region: -62.99,-62.99 63,-62.99 63,63 -62.99,63
  silkscreen extent -102,-79 79,83
LGA-16L [mil] "LGA-16L"
  rect 26x12 smd: 1(-53.94,40) 2(-53.94,20) 3(-53.94,0) 4(-53.94,-19.69) 5(-53.94,-39.37) 9(54,-39.37) 10(54,-19.68) 11(54,0) 12(54,20) 13(54,40)
  rect 12x26 smd: 6(-19.68,-53.94) 7(0,-53.94) 8(20,-53.94) 14(20,54) 15(0,54) 16(-19.69,54)
  silkscreen extent -74,-65 65,74
MICROSD [mil] "MICROSD"
  rect 32x60 smd far side: 1(-76.38,107) 2(-33.07,91) 3(11,107) 4(54,115) 5(97,107) 6(141,115) 7(184,107) 8(227,107)
  rect 56x75 smd far side: NC(-269.68,258) NC3(258,219)
  rect 71x56 smd far side: NC1(-29.53,-299.21) NC2(195,-299.21)
MICROSMP [mil] "MICROSMP"
  rect 32x32 smd: ANODE(26,0)
  rect 79x44 smd: CATHODE(-49.21,0)
  silkscreen extent -67,-24 24,35
MLF-8-EPAD [mil] "MLF-8-EPAD"
  rect 20x12 smd: 1(-31.5,30)
  rrect40% 20x12 smd: 2(-31.5,10) 3(-31.5,-9.84) 4(-31.5,-29.53) 5(32,-29.53) 6(32,-9.84) 7(32,10) 8(32,30)
  rrect40% 28x56 smd: GND(0,0)
  silkscreen extent -39,-39 40,40
MO-220 [mil] "MO-220"
  rect 28x10 smd: P$1(-74.8,50) P$2(-74.8,30) P$3(-74.8,10) P$4(-74.8,-9.84) P$5(-74.8,-29.53) P$6(-74.8,-49.21) P$13(75,-49.21) P$14(75,-29.53) P$15(75,-9.84) P$16(75,10) P$17(75,30) P$18(75,50)
  rect 10x28 smd: P$7(-49.21,-74.8) P$8(-29.53,-74.8) P$9(-9.84,-74.8) P$10(10,-74.8) P$11(30,-74.8) P$12(50,-74.8) P$19(50,75) P$20(30,75) P$21(10,75) P$22(-9.84,75) P$23(-29.53,75) P$24(-49.21,75)
  rect 97x97 smd: P$25(0,0)
  silkscreen extent -79,-79 79,79
MOLEX-47346-0001 [mil] "MOLEX-47346-0001"
  rect 67x18 smd: D+(111,0) D-(111,26) GND(111,-51.18) ID(111,-25.59) VBUS(111,52)
  rect 75x94 smd: GND1(0,117) GND4(0,-116.14)
  rect 83x59 smd: GND2(91,99) GND3(91,-98.43)
  rect 75x47 smd: GND5(0,-32.97) GND6(0,33)
  Top keep-out region: 48,-62.99 73,-62.99 73,63 48,63
  silkscreen extent 52,-157 111,158
MOUNT-HOLE3.1 [mil] "MOUNT-HOLE3.1"
  round 162 hole 123: P$1(0,0)
  silkscreen extent -95,-95 95,95
MS621FE [mil] "MS621FE"
  rect 119x30 smd: 1(203,30) 2(203,-29.53)
  silkscreen extent -134,-134 134,134
MS5611-01BA [mil] "MS5611-01BA"
  rect 44x24 smd: 1(-43.31,74) 2(-43.31,25) 3(-43.31,-24.61) 4(-43.31,-73.82) 5(44,-73.82) 6(44,-24.61) 7(44,25) 8(44,74)
  silkscreen extent -69,-108 69,109
OSCILLATOR-3.2X2.5 [mil] "OSCILLATOR-3.2X2.5"
  rect 56x48 smd: 1(-43.31,-33.46) 2(44,-33.46) 3(44,34) 4(-43.31,34)
  silkscreen extent -95,-83 83,71
OSHW-LOGO-S [mil] "OSHW-LOGO-S"
  silkscreen extent -59,-47 59,59
PAD.04X.04#1 [mil] "PAD.04X.04"
  rrect100% 40x40 smd: P$1(0,0)
  silkscreen extent -26,-26 26,26
PAD.04X.04#2 [mil] "PAD.04X.04"
  rrect100% 40x40 smd far side: P$1(0,0)
PTC-1206 [mil] "PTC-1206"
  rect 40x71 smd: 1(-55.12,0) 2(56,0)
  silkscreen extent -25,-30 25,30
QFN8-DSG [mil] "QFN8-DSG"
  rect 12x20 smd: 1(-29.53,-37.4) 2(-9.84,-37.4) 3(10,-37.4) 4(30,-37.4) 5(30,38) 6(10,38) 7(-9.84,38) 8(-29.53,38)
  rect 63x36 smd: GND(0,0)
  rect 18x18 hole 12: P$2(-15.75,0) P$3(16,0)
  silkscreen extent -61,-39 40,40
QFN20-RGY [mil] "QFN20-RGY"
  rect 12x34 smd: 1(-29.53,89) 10(-29.53,-88.58) 11(30,-88.58) 20(30,89)
  rect 34x12 smd: 2(-68.9,69) 3(-68.9,50) 4(-68.9,30) 5(-68.9,10) 6(-68.9,-9.84) 7(-68.9,-29.53) 8(-68.9,-49.21) 9(-68.9,-68.9) 12(69,-68.9) 13(69,-49.21) 14(69,-29.53) 15(69,-9.84) 16(69,10) 17(69,30) 18(69,50) 19(69,69)
  silkscreen extent -82,-89 69,102
QFN-24 [mil] "QFN-24"
  rect 32x12 smd: 1(-78.74,50) 2(-78.74,30) 3(-78.74,10) 4(-78.74,-9.84) 5(-78.74,-29.53) 6(-78.74,-49.21) 13(79,-49.21) 14(79,-29.53) 15(79,-9.84) 16(79,10) 17(79,30) 18(79,50)
  rect 12x32 smd: 7(-49.21,-78.74) 8(-29.53,-78.74) 9(-9.84,-78.74) 10(10,-78.74) 11(30,-78.74) 12(50,-78.74) 19(50,79) 20(30,79) 21(10,79) 22(-9.84,79) 23(-29.53,79) 24(-49.21,79)
  Top region: -19.68,-19.69 20,-19.69 20,20 -19.68,20
  silkscreen extent -79,-79 79,79
SO08 [mil] "SO08"
  rect 24x87 smd: 1(-75,-103) 2(-25,-103) 3(25,-103) 4(75,-103) 5(75,103) 6(25,103) 7(-25,103) 8(-75,103)
  silkscreen extent -93,-71 93,71
SOD323 [mil] "SOD323"
  rect 32x24 smd: A(50,0) C(-49.21,0)
  silkscreen extent -62,-26 50,26
SON10 [mil] "SON10"
  rect 13x20 smd: 1(-39.37,-54.13) 2(-19.68,-54.13) 3(0,-54.13) 4(20,-54.13) 5(40,-54.13) 6(40,55) 7(20,55) 8(0,55) 9(-19.68,55) 10(-39.37,55)
  silkscreen extent -57,-55 58,56
SOT23-3 [mil] "SOT23-3"
  rect 32x36 smd: 1(-37.4,-39.37) 2(38,-39.37) 3(0,44)
  silkscreen extent -55,-4 56,28
SOT23-8 [mil] "SOT23-8"
  rect 17x52 smd: 1(-38.39,-46.26) 2(-12.8,-46.26) 3(13,-46.26) 4(39,-46.26) 5(39,47) 6(13,47) 7(-12.8,47) 8(-38.39,47)
  silkscreen extent -59,-39 60,40
SOT563-6 [mil] "SOT563-6"
  rect 12x18 smd: 1(-19.69,-26.57) 2(0,-26.57) 3(20,-26.57) 4(20,27) 5(0,27) 6(-19.68,27)
  silkscreen extent -31,-24 32,24
TQFP48 [mil] "TQFP48"
  rect 10x40 smd: 1(-108.27,-177.17) 2(-88.58,-177.17) 3(-68.9,-177.17) 4(-49.21,-177.17) 5(-29.53,-177.17) 6(-9.84,-177.17) 7(10,-177.17) 8(30,-177.17) 9(50,-177.17) 10(69,-177.17) 11(89,-177.17) 12(109,-177.17) 25(109,178) 26(89,178) 27(69,178) 28(50,178) 29(30,178) 30(10,178) 31(-9.84,178) 32(-29.53,178) 33(-49.21,178) 34(-68.9,178) 35(-88.58,178) 36(-108.27,178)
  rect 40x10 smd: 13(178,-108.27) 14(178,-88.58) 15(178,-68.9) 16(178,-49.21) 17(178,-29.53) 18(178,-9.84) 19(178,10) 20(178,30) 21(178,50) 22(178,69) 23(178,89) 24(178,109) 37(-177.17,109) 38(-177.17,89) 39(-177.17,69) 40(-177.17,50) 41(-177.17,30) 42(-177.17,10) 43(-177.17,-9.84) 44(-177.17,-29.53) 45(-177.17,-49.21) 46(-177.17,-68.9) 47(-177.17,-88.58) 48(-177.17,-108.27)
  silkscreen extent -133,-133 133,133
TQFP100 [mil] "TQFP100"
  rect 60x12 smd: 1(-314.96,237) 2(-314.96,217) 3(-314.96,197) 4(-314.96,178) 5(-314.96,158) 6(-314.96,138) 7(-314.96,119) 8(-314.96,99) 9(-314.96,79) 10(-314.96,60) 11(-314.96,40) 12(-314.96,20) 13(-314.96,0) 14(-314.96,-19.68) 15(-314.96,-39.37) 16(-314.96,-59.06) 17(-314.96,-78.74) 18(-314.96,-98.43) 19(-314.96,-118.11) 20(-314.96,-137.8) 21(-314.96,-157.48) 22(-314.96,-177.17) 23(-314.96,-196.85) 24(-314.96,-216.54) 25(-314.96,-236.22) 51(315,-236.22) 52(315,-216.54) 53(315,-196.85) 54(315,-177.17) 55(315,-157.48) 56(315,-137.8) 57(315,-118.11) 58(315,-98.43) 59(315,-78.74) 60(315,-59.06) 61(315,-39.37) 62(315,-19.69) 63(315,0) 64(315,20) 65(315,40) 66(315,60) 67(315,79) 68(315,99) 69(315,119) 70(315,138) 71(315,158) 72(315,178) 73(315,197) 74(315,217) 75(315,237)
  rect 12x60 smd: 26(-236.22,-314.96) 27(-216.54,-314.96) 28(-196.85,-314.96) 29(-177.17,-314.96) 30(-157.48,-314.96) 31(-137.8,-314.96) 32(-118.11,-314.96) 33(-98.43,-314.96) 34(-78.74,-314.96) 35(-59.06,-314.96) 36(-39.37,-314.96) 37(-19.69,-314.96) 38(0,-314.96) 39(20,-314.96) 40(40,-314.96) 41(60,-314.96) 42(79,-314.96) 43(99,-314.96) 44(119,-314.96) 45(138,-314.96) 46(158,-314.96) 47(178,-314.96) 48(197,-314.96) 49(217,-314.96) 50(237,-314.96) 76(237,315) 77(217,315) 78(197,315) 79(178,315) 80(158,315) 81(138,315) 82(119,315) 83(99,315) 84(79,315) 85(60,315) 86(40,315) 87(20,315) 88(0,315) 89(-19.68,315) 90(-39.37,315) 91(-59.06,315) 92(-78.74,315) 93(-98.43,315) 94(-118.11,315) 95(-137.8,315) 96(-157.48,315) 97(-177.17,315) 98(-196.85,315) 99(-216.54,315) 100(-236.22,315)
  silkscreen extent -276,-276 276,276
TSSOP8_SOT505-2 [mil] "TSSOP8_SOT505-2"
  rect 14x34 smd: 1(-38.39,-69.88) 2(-12.8,-69.88) 3(13,-69.88) 4(39,-69.88) 5(39,70) 6(13,70) 7(-12.8,70) 8(-38.39,70)
  silkscreen extent -73,-85 58,40

## Part data
!VBUS_VALID !VDD_BRICK_VALID !VDD_SERVO_VALID ADC_PR CAN_H CAN_L FMU-BOOT1101 GND GND. IO-BOOT1101 S1RX S1TX S2RX S2TX S3RX S3TX S4RX S4TX S5_RX S5_TX VBUS VDD_3V1101 VDD_5V_BRICK VDD_5V_IN VDD_SERVO VDDA_3V1101: library part PAD.04X.04
C101 C102 C103 C201 C202 C401 C402 C502 C503 C504 C505 C507 C508 C510 C514 C602 C606 C607 C608 C609 C610 C612 C615 C616 C617 C701 C703 C704 C801 C802 C803 C804 C805 C806 C901 C902 C903 C1002 C1005 C1008 C1105 C1106 C1107 C1108 C1109 C1110: library part 0402-CAP
C501 C506 C509 C511 C601 C604 C605 C1001 C1101 C1102 C1103: library part 0805-CAP
C512 C513 C515 C603 C611 C613 C702 C1003 C1004: library part 0603-CAP
C614 C618 C1104: library part 1206-CAP
D201 D202 D203 D401 D402 D403 D404 D701 D801 D901 D902 D903: library part 0402-TVS
D602: library part SOD323
D904: library part MICROSMP
D1001: library part SOT23-3
F1001: library part PTC-1206
J201 J202 J203 J204 J601: library part DF13C-6P-1.25V
J301: library part MOLEX-47346-0001
J302 J401 J405: library part DF13C-4P-1.25V
J402 J702: library part DF13C-3P-1.25V
J403: library part DF13C-7P-1.25V
J404: library part DF13C-5P-1.25V
J701: library part DF13C-2P-1.25V
J801: library part JST-ZH-SMT-VERTICAL
J901: library part 3X16RA
JP1 JP2: library part FIDUCIAL-1.5X3
JX301 JX802: library part FTSH-105-01-XXX-DV-K
JX801: library part HEADER_3X01_SMD_H_BOARD_EDGE_SHORT
L201 L202 L203 L401 L402 L403 L404 L603 L901 L1101 L1102: library part KYOCERA-KNH16-DA
L701: library part 0805-IND
LED701 LED702 LED703 LED704 LED705: library part 0603-LED
M3_MOUNT1101 M3_MOUNT1102 M3_MOUNT1103 M3_MOUNT1104: library part MOUNT-HOLE3.1
OSHW_LOGO: library part OSHW-LOGO-S
R101 R102 R201 R202 R203 R204 R205 R206 R207 R208 R209 R210 R211 R212 R213 R214 R215 R216 R301 R302 R303 R304 R305 R306 R307 R401 R402 R403 R404 R405 R406 R407 R408 R409 R602 R603 R604 R608 R609 R610 R611 R615 R616 R617 R635 R701 R702 R703 R704 R705 R706 R707 R708 R709 R710 R711 R712 R713 R735 R736 R801 R802 R803 R804 R901 R902 R903 R904 R905 R906 R907 R908 R909 R910 R911 R912 R913 R914 R915 R916 R917 R918 R919 R922 R1001 R1002 R1101 R1102 R1103 R1104 R1105 R1106 R1107 R1109 R1110 R1111 R1112 R1113 R1114 R1115: library part 0402-RES
R621: library part 0603-RES
RN1101: library part EXB28V
S601 S801: library part EVQP7J01K
U101: library part TQFP100
U102: library part SO08
U201 U202 U901 U902: library part QFN20-RGY
U301: library part MICROSD
U302: library part SOT563-6
U401 U702: library part SOT23-8
U501: library part L3G4200DH-MAN
U502 U504: library part LGA-16L
U505: library part QFN-24
U601 U602 U1001: library part QFN8-DSG
U603 U1002: library part MLF-8-EPAD
U701: library part SON10
U703: library part 6-PLCC
U801: library part TQFP48
U903: library part TSSOP8_SOT505-2
U1101: library part MO-220
U1102 U1103 U1104: library part 1206-8
X101 X801: library part OSCILLATOR-3.2X2.5
X503: library part 51281-1094

## Via types
v1: diameter 17.84/17.84/17.84/17.84/17.84/17.84 (per signal layer), hole 8, Top to Bottom, 333 vias
v2: diameter 21.84/21.84/21.84/21.84/21.84/21.84 (per signal layer), hole 12, Top to Bottom, 129 vias
v3: diameter 15.84/15.84/15.84/15.84/15.84/15.84 (per signal layer), hole 6, Top to Bottom, 8 vias
v4: diameter 19.84/19.84/19.84/19.84/19.84/19.84 (per signal layer), hole 10, Top to Bottom, 2 vias

## Nets (pads, with @x,y where several pads share a name; then routed paths per layer and width w, separated by ;. In a path a pad name is that pad's centre, name@x,y a point inside that pad or via, vN(x,y) a via of type N, cw(c..) or ccw(c..) an arc to the next point about the centre after c; other vN are vias at no path point)
!ACCEL_MAG_CS: U101.9 U504.8 X503.6 | length 1961.9
  Top w6: U101.9@2226,1617 2257,1648 v1(2260,1648) ; v1(3208,1340) 3208,1136 3230,1115 X503.6@3230,1048 ; v1(3504,1312) 3516,1300 3516,1244 3528,1232 3536,1232 3545,1224 3545,1206 U504.8@3545,1208
  Horizontal w6: v1(2260,1648) 2260,1616 2324,1552 2332,1552 2348,1568 2404,1568 2560,1412 2624,1412 2676,1360 3112,1360 3124,1348 3200,1348 v1(3208,1340) 3256,1340 3264,1348 3288,1348 v3(3312,1324)
  Vertical w6: v3(3312,1324) 3360,1276 3428,1276 3444,1260 3472,1260 3484,1272 3484,1304 3492,1312 v1(3504,1312)
!BARO_CS: U101.88 U506.5 | length 1852.9
  Top w6: U101.88@2282,2007 2308,1980 2308,1800 v1(2292,1784) ; v3(3464,1284) 3476,1273 U506.5@3491,1273
  Horizontal w6: v1(2292,1784) 2332,1744 2756,1744 2808,1692 3384,1692 3440,1636 v1(3440,1556)
  Vertical w6: v1(3440,1556) 3464,1536 3464,1428 3476,1416 3476,1404 3464,1388 v3(3464,1284)
!FMU-LED_AMBER: R707.P$1 U101.43 | length 1914.6
  Top w6: v1(1644,2192) 1728,2192 1748,2212 1748,2232 1684,2296 1684,2464 1708,2488 R707.P$1@1708,2548 ; v1(2760,1668) U101.43@2797,1631
  Horizontal w6: v1(1644,2192) 1656,2192 1920,1928 2012,1928 2036,1904 2036,1884 2064,1856 2080,1856 2104,1832 2104,1776 2180,1700 2728,1700 v1(2760,1668)
!FRAM_CS: U101.57 U102.1 | length 531.6
  Top w6: U101.57@2811,1924 2860,1973 2860,2064 2960,2164 2960,2268 2972,2280 3016,2280 3035,2261 U102.1@3034.98,2223.01
!GYRO_CS: U101.7 U501.5 U502.5 X503.7 | length 2068
  Top w6: U101.7@2198,1645 2285,1732 v1(2288,1732) ; v1(3208,1108) 3210,1107 X503.7@3210,1048 ; v1(3240,1408) 3240,1404 3265,1380 U502.5@3265,1362 ; v1(3432,1520) 3455,1543 U501.5@3478,1543
  Horizontal w6: v1(2288,1732) 2748,1732 2800,1680 3228,1680 3260,1648 v1(3260,1492) 3404,1492 v1(3432,1520)
  Vertical w6: v1(3208,1108) 3208,1312 3188,1332 3188,1356 v1(3240,1408) 3240,1436 3260,1456 v1(3260,1492)
!IO-LED_AMBER: R709.P$1 U801.28 | length 333.6
  Top w6: v1(1864,1300) 1864,1272 1888,1248 1888,1236 R709.P$1@1912,1212 ; v1(1920,1452) 1920,1451 U801.28@1955,1416
  Bottom w6: v1(1864,1300) 1864,1344 1920,1400 v1(1920,1452)
!IO-LED_BLUE: R712.P$1 U801.27 | length 88.2
  Top w6: U801.27@1941,1403 1960,1383 1960,1344 1956,1340 R712.P$1@1956,1324
!IO-LED_SAFETY: R710.P$2 U801.26 | length 117
  Top w6: R710.P$2@1911.99,1292 1912,1320 1944,1352 1944,1371 U801.26@1927,1389
!MPU_CS: U101.17 U505.8 | length 1945.6
  Top w6: U101.17@2337,1506 2338,1506 2364,1532 2364,1540 2372,1548 v1(2372,1604) ; v1(3356,1780) 3372,1796 3484,1796 3491,1790 U505.8@3510,1790
  Horizontal w6: v1(2372,1604) 2372,1616 2392,1636 2636,1636 2648,1644 v1(2648,1668) ; v1(2620,2008) 2664,2052 3172,2052 3180,2044 3180,1960 3172,1952 3172,1920 v1(3196,1896)
  Vertical w6: v1(2620,2008) 2648,1980 v1(2648,1668) ; v1(3196,1896) 3204,1888 3204,1812 3220,1796 3308,1796 3324,1780 v1(3356,1780)
!SBUS_OUTPUT_EN: U801.40 U903.7 | length 1309.8
  Top w6: U903.7@1518,1081 1497,1081 1488,1072 1488,1020 1496,1012 1548,1012 1600,1064 1600,1088 1616,1104 1676,1104 1688,1116 v1(1688,1140) ; U801.40@2025,1667 1972,1615 1972,1600 v1(2028,1544)
  Horizontal w6: v1(1688,1140) 1688,1108 1720,1072 1876,1072 1904,1100 1904,1336 2028,1460 v1(2028,1544)
!SPI_EXT_NSS: J403.5 U101.3 | length 1580.4
  Top w6: U101.3@2143,1701 2196,1755 v1(2196,1768)
  Horizontal w6: v1(2412,2312) 2656,2312 2708,2260 v1(3076,2260)
  Vertical w6: v1(2196,1768) 2196,1780 2336,1920 2336,2236 v1(2412,2312)
  Bottom w6: v1(3076,2260) 3090,2247 3119,2247 3124,2252 3140,2252 3148,2244 3234,2244 3237,2247
!VBUS_VALID: !VBUS_VALID.P$1 RN1101.2 U101.15 U1101.P$9 | length 1904.9
  Top w6: U101.15@2310,1534 2352,1576 v1(2352,1624) ; RN1101.2@3258,2095 3282,2095 v1(3284,2092) ; v1(3392,2192) 3396,2196 3408,2196 3427,2215 U1101.P$9@3427,2238
  Horizontal w6: v1(2352,1624) 2352,1632 2400,1680 2612,1680 v1(2624,1668) ; v1(2576,2008) 2600,1984 2624,1984 2680,2040 3052,2040 v1(3096,1996)
  Vertical w6: v1(2576,2008) 2624,1960 v1(2624,1668) ; v1(3096,1996) 3152,1996 3172,2016 3172,2084 3180,2092 v1(3284,2092) 3376,2092 3392,2108 v1(3392,2192)
!VDD_5V_HIPOWER_OC: R602.P$1 U101.41 U601.4 | length 1021.7
  Top w6: U601.4@2514,2399 2514,2354 v1(2512,2352) 2512,2328 2555,2286 R602.P$1@2590,2286 ; v1(2720,1652) U101.41@2769,1604
  Vertical w6: v1(2512,2352) 2512,2328 2592,2248 2592,2124 2720,1996 v1(2720,1652)
!VDD_5V_PERIPH_EN: R615.P$1 U101.67 U601.5 U602.5 | length 1335.9
  Top w6: U601.5@2514,2474 2540,2447 v1(2540,2352) ; U101.67@2672,2063 2704,2096 v1(2704,2100) ; R615.P$1@3380,2072 v1(3404,2072) 3407,2070 U602.5@3427,2070
  Horizontal w6: v1(2704,2100) 2740,2064 2972,2064 3008,2100 3160,2100 3168,2092 3204,2092 3264,2032 3304,2032 3320,2048 3380,2048 v1(3404,2072) 3396,2064
  Vertical w6: v1(2540,2352) 2540,2320 2604,2256 2604,2200 v1(2704,2100)
!VDD_5V_PERIPH_OC: R604.P$1 U101.46 U602.4 | length 1678.3
  Top w6: v1(2820,1760) 2812,1752 2812,1699 U101.46@2839,1673 ; v1(3208,1968) 3248,2008 R604.P$1@3248,2040 ; U602.4@3502,2070 3502,2086 v1(3504,2088)
  Horizontal w6: v1(2848,2096) 2972,2096 3000,2124 3156,2124 3176,2104 3220,2104 3264,2060 3308,2060 3336,2088 3388,2088 3392,2092 3416,2092 3420,2088 v1(3504,2088) 3500,2084 3500,2012 3456,1968 v1(3208,1968)
  Vertical w6: v1(2820,1760) 2808,1768 2808,1796 2820,1808 2820,2000 2804,2016 2804,2052 v1(2848,2096)
!VDD_BRICK_VALID: !VDD_BRICK_VALID.P$1 RN1101.4 U101.91 U1101.P$7 | length 2238.9
  Top w6: v1(2200,2000) 2205,2000 U101.91@2240,1965 ; v1(3084,1948) 3084,1964 3064,1984 3064,2008 3084,2028 !VDD_BRICK_VALID.P$1@3084,2076 ; RN1101.4@3258,2139 3279,2139 v1(3288,2148) ; v1(3356,2228) 3366,2238 U1101.P$7@3387,2238
  Horizontal w6: v1(2228,2264) 2308,2264 2320,2252 2504,2252 2544,2212 3112,2212 3120,2204 3140,2204 3148,2212 3340,2212 v1(3356,2228)
  Vertical w6: v1(2200,2000) 2228,2028 v1(2228,2264) ; v1(3084,1948) 3084,1968 3068,1984 3068,2008 3084,2024 3084,2132 3120,2168 3268,2168 v1(3288,2148) 3288,2160 v1(3356,2228)
!VDD_SERVO_VALID: !VDD_SERVO_VALID.P$1 RN1101.3 U101.93 U1101.P$8 | length 2177
  Top w6: U101.93@2212,1938 2236,1913 v1(2236,1896) ; v1(3128,2020) 3140,2032 !VDD_SERVO_VALID.P$1@3140,2080 ; RN1101.3@3258,2114 3282,2114 v1(3292,2124) ; v1(3372,2208) 3376,2212 3400,2212 3407,2219 U1101.P$8@3407,2238
  Horizontal w6: v1(2248,2244) 2308,2244 2312,2240 2436,2240 2476,2200 3104,2200 3116,2188 3144,2188 3156,2200 3348,2200 3356,2208 v1(3372,2208)
  Vertical w6: v1(2236,1896) 2248,1908 v1(2248,2244) ; v1(3128,2020) 3100,2048 3100,2112 3112,2124 v1(3292,2124) 3304,2124 3312,2132 3364,2132 3372,2140 v1(3372,2208)
ACCEL_DRDY: U101.90 U504.11 X503.3 | length 2170
  Top w6: U101.90@2254,1979 2284,1948 2284,1828 2256,1800 v1(2256,1732) ; v1(3288,1112) 3288,1049 X503.3@3289,1048 ; v1(3480,1160) 3488,1152 U504.11@3511,1152
  Horizontal w6: v1(2288,1256) 2424,1256 2536,1144 2728,1144 2736,1144 2860,1144 2928,1076 3252,1076 v1(3288,1112) 3336,1160 v1(3480,1160)
  Vertical w6: v1(2256,1732) 2300,1688 2300,1268 v1(2288,1256)
ALARM: R701.P$2 U101.77 | length 1595.9
  Top w6: R701.P$2@1349,2120 1349,2116 v1(1368,2096) ; U101.77@2435,2160 2471,2124 v1(2512,2124)
  Horizontal w6: v1(1368,2096) 1368,2320 1396,2348 1596,2348 1668,2276 2128,2276 2280,2124 v1(2512,2124)
BATT_CURRENT_SENS: R1101.P$1 U101.26 | length 1703.1
  Top w6: U101.26@2560,1395 2576,1378 v1(2576,1356) ; v1(3324,2112) 3328,2116 R1101.P$1@3341,2116
  Horizontal w6: v1(2532,2096) 2556,2120 2976,2120 2996,2140 3160,2140 3184,2116 3228,2116 3272,2072 3300,2072 3308,2080 3308,2096 v1(3324,2112)
  Vertical w6: v1(2532,2096) 2548,2080 2548,1952 2528,1932 2528,1444 2576,1396 v1(2576,1356)
BATT_CURRENT_SENS_PROT: J601.3 L1101.P$1 R1104.P$1 | length 490.1
  Top w6: L1101.P$1@3480,2116 v1(3504,2116) ; v1(3544,2052) R1104.P$1@3573,2052
  Vertical w6: v1(3504,2116) 3544,2076 v1(3544,2052)
  Bottom w6: v1(3504,2116) 3560,2116 3604,2160 3604,2328 3588,2345 3541,2345
BATT_VOLTAGE_SENS: R1102.P$1 U101.25 | length 1717.2
  Top w6: U101.25@2449,1395 2463,1408 v1(2488,1408) ; v1(3320,2160) R1102.P$1@3341,2160
  Horizontal w6: v1(2484,2176) 2492,2184 3100,2184 3108,2176 3152,2176 3160,2184 3296,2184 v1(3320,2160)
  Vertical w6: v1(2484,2176) 2484,2060 2452,2028 2452,1444 v1(2488,1408)
BATT_VOLTAGE_SENS_PROT: J601.4 L1102.P$1 R1103.P$1 | length 503.7
  Top w6: L1102.P$1@3480,2172 3496,2156 v1(3504,2156) ; v1(3544,2008) R1103.P$1@3573,2008
  Vertical w6: v1(3504,2156) 3564,2096 3564,2028 v1(3544,2008)
  Bottom w6: v1(3504,2156) 3580,2156 3592,2168 3592,2280 3577,2296 3541,2296
CAN1_RX: U101.81 U401.4 | length 1225.1
  Top w6: U101.81@2379,2105 2423,2060 v1(2424,2060) ; U401.4@2623,1098 2642,1098 v1(2660,1116)
  Horizontal w6: v1(2504,1144) 2532,1116 v1(2660,1116)
  Vertical w6: v1(2424,2060) 2440,2044 2440,1208 v1(2504,1144)